# EAGLE board SE423_F28379D (EAGLE 7.7.0), part 1 of 3
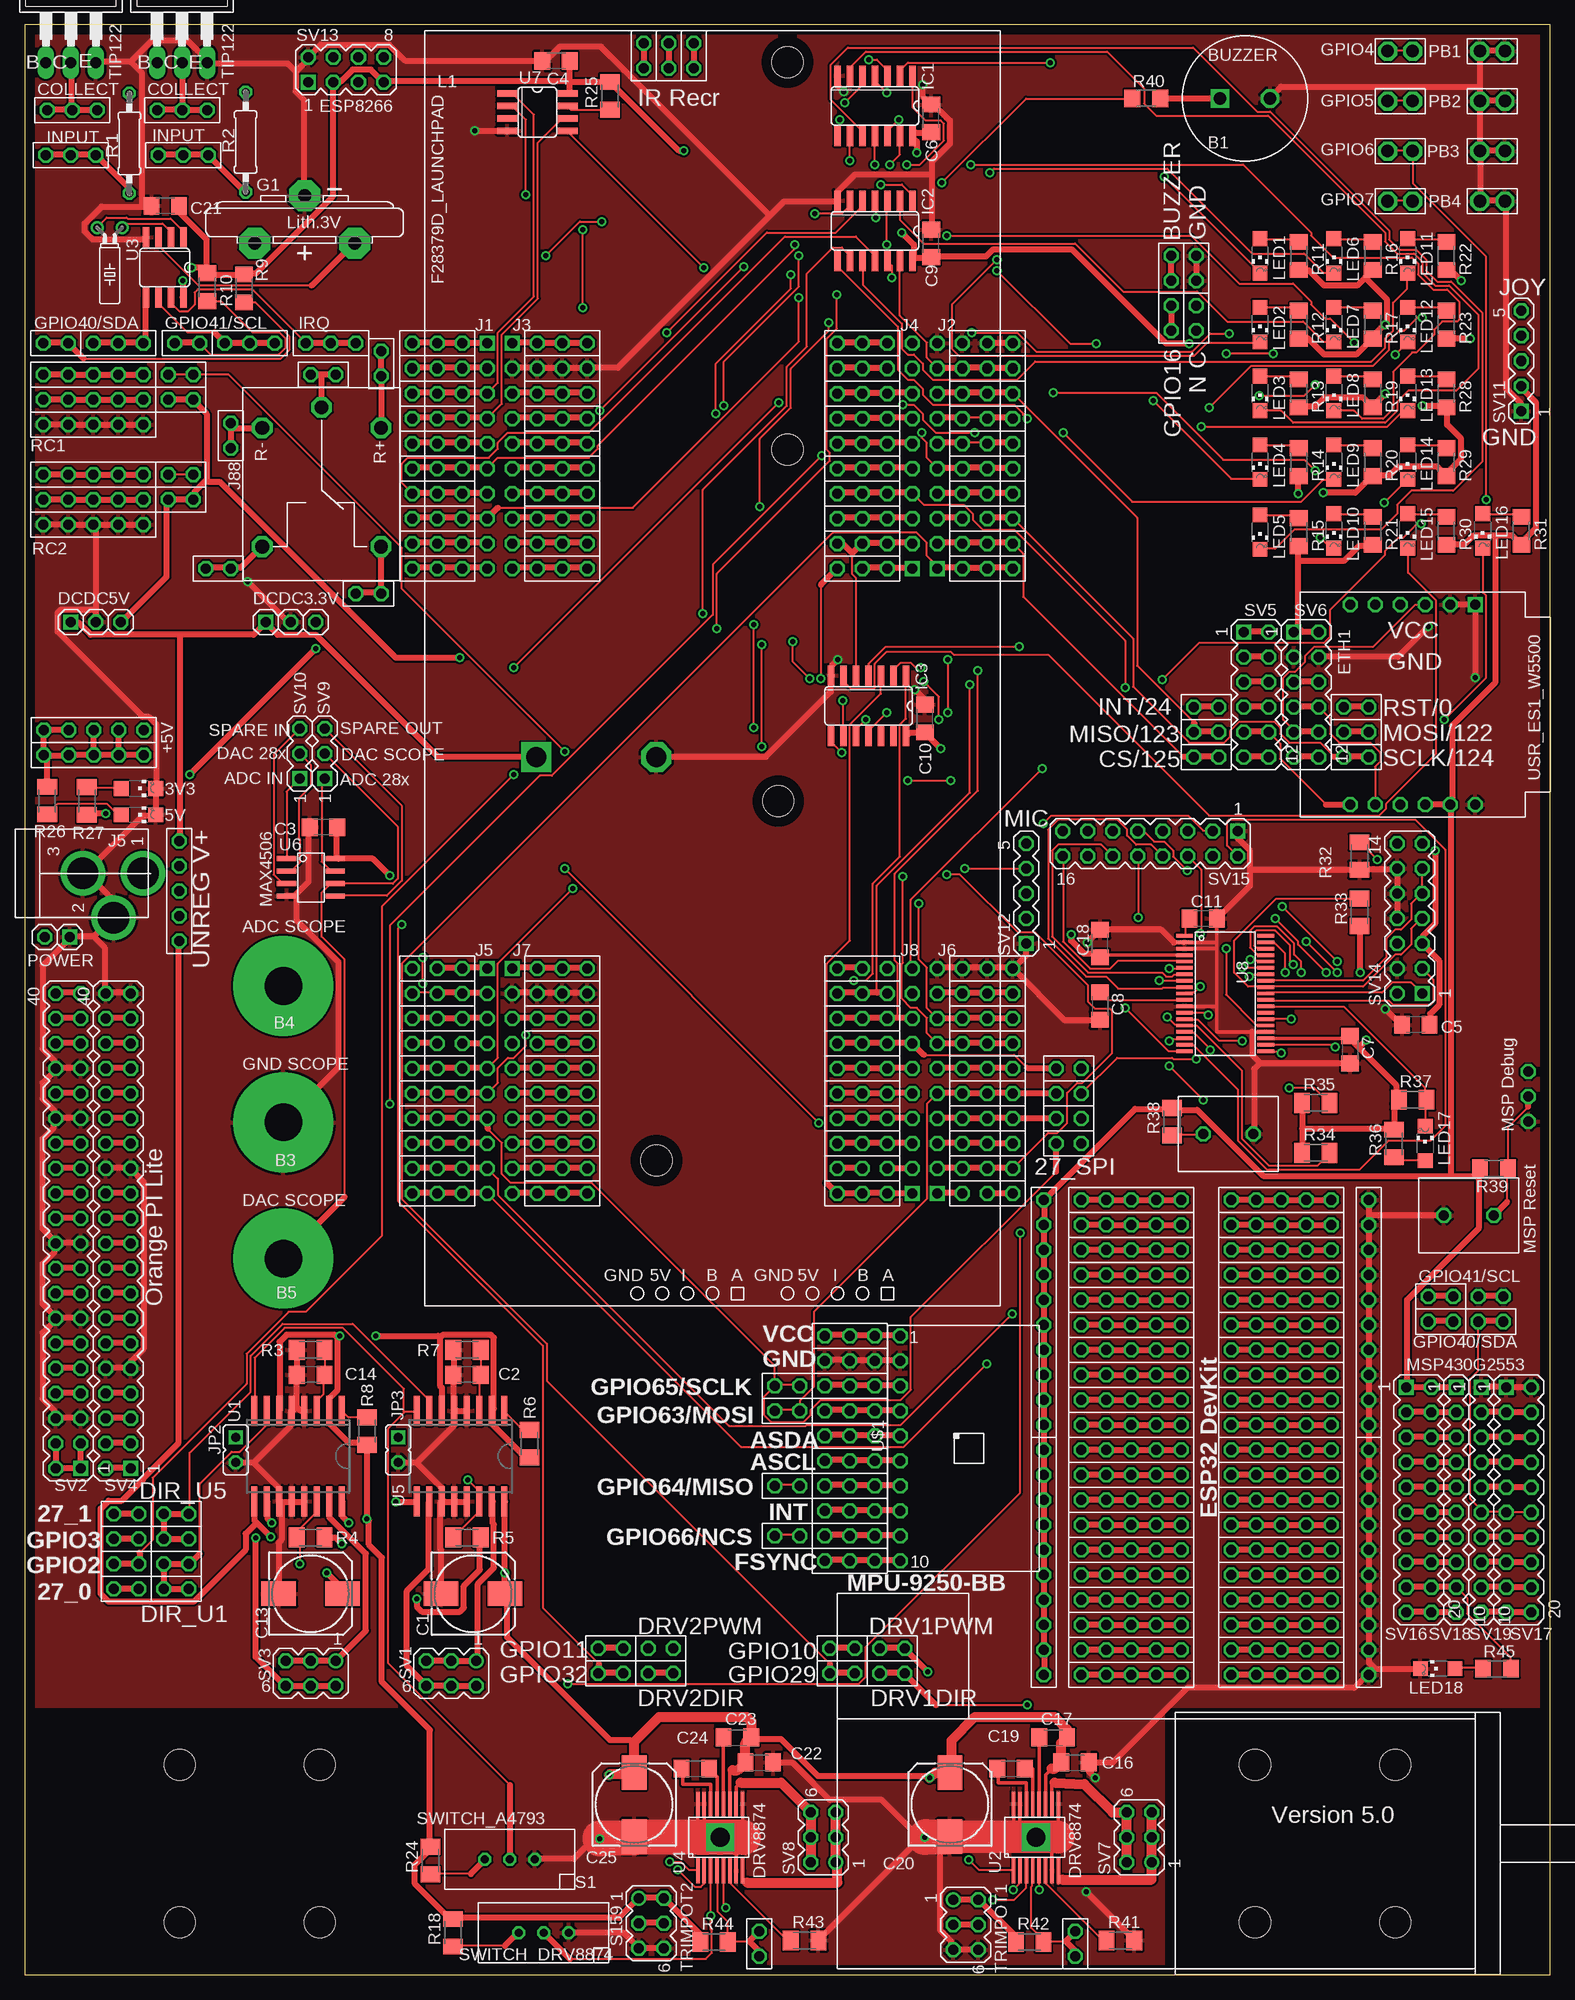
[diagram p0: board, top side]
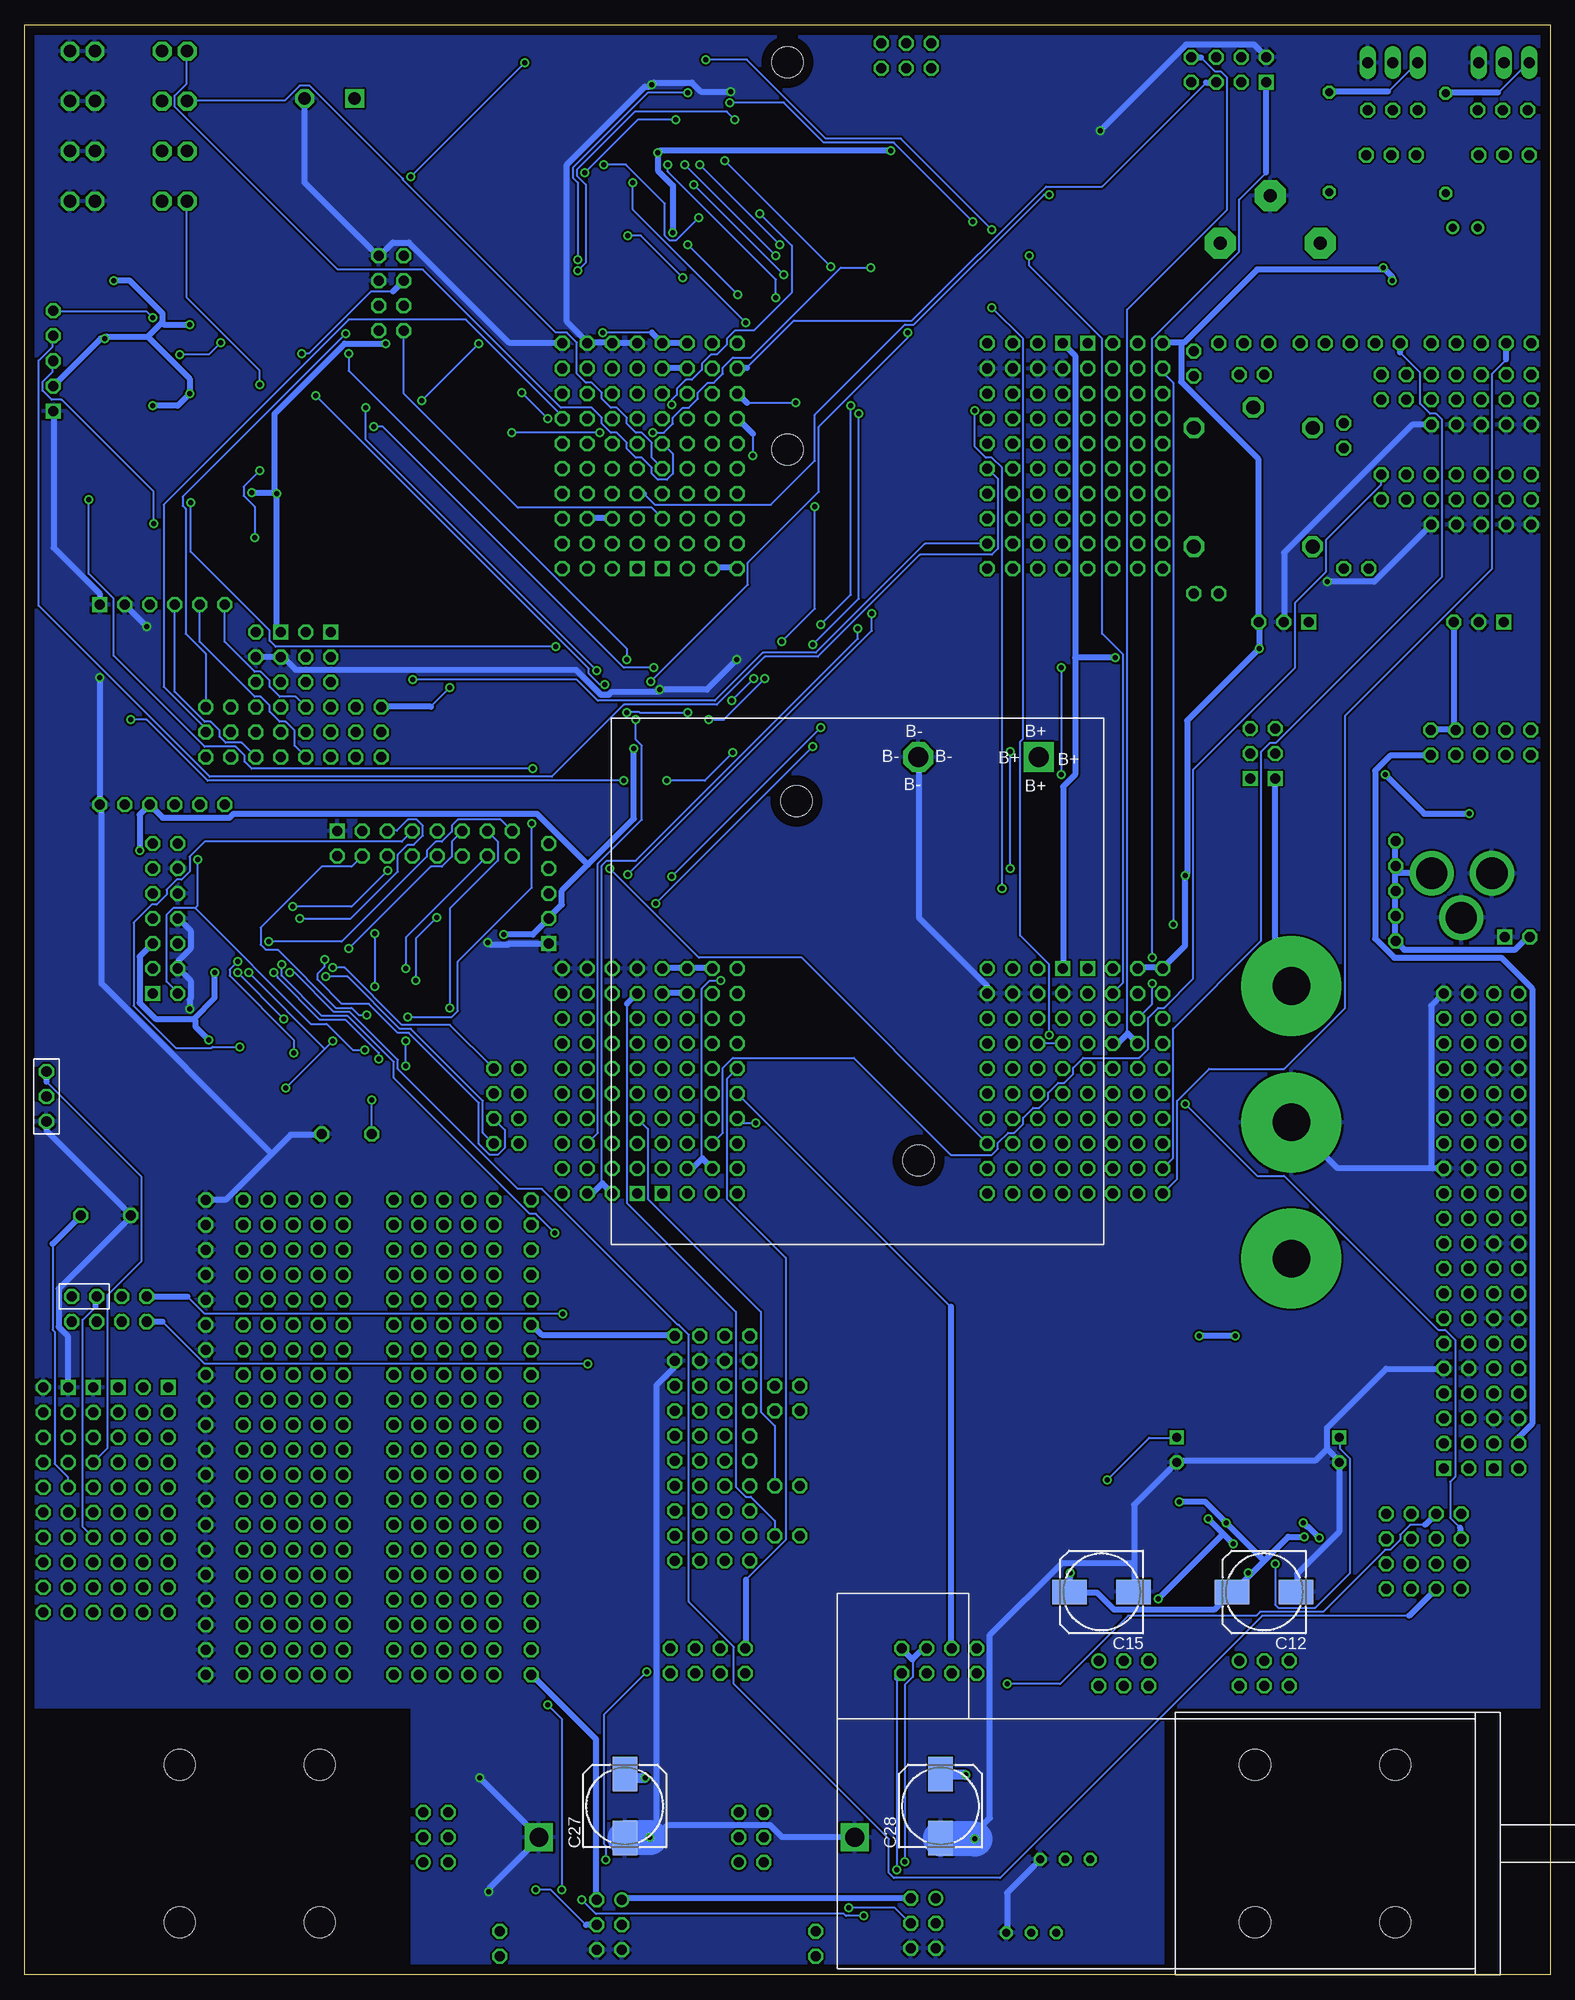
[diagram p1: board, bottom side, seen from below]

Size 154.94 x 198.12 mm. Coordinates in mm from the lower left corner, seen from the top.
Outline: 0,0 154.94,0 154.94,198.12 0,198.12 0,0
Copper layers (1*16): Top 0.035mm / dielectric 1.5mm / Bottom 0.035mm
Design rules "default *": minimum track width 7mil, minimum drill 20mil, track to track 8mil, track to pad 8mil, pad to pad 8mil, via to via 8mil, smd to smd 8mil, copper to edge 40mil, drill to drill 8mil, minimum pad ring 10mil, minimum via ring 8mil, stop-mask expansion 4mil, vias tented up to drill 20mil, thermal gap 10mil
Net classes: 0 default: width 0.203 mm, drill 0.508 mm, clearance 0.203 mm; 1 supply: width 0.61 mm, drill 0.508 mm, clearance 0.203 mm
tRestrict: area 0,0 to 38.7,26.7; area 116.2,0 to 154.9,26.7
bRestrict: area 116.2,0 to 154.9,26.7; area 0,0 to 38.7,26.7

## Footprints (pad centres in the part's own frame; a part is rotated, then mirrored left to right if it is on the bottom)
CHIPLED_1206 = smd 1.5 x 1.5: A 0,-1.75; C 0,1.75
BUZZER = drill 1.27 square: P$1 -2.54,0 | drill 1.27 octagon: P$2 2.54,0
BATTERY_4AA_HOLDER = drill 2.032 square: P$1 0,0 | drill 2.032 octagon: P$2 12.224,0 | hole 3.175: 12.224,40.958; 24.606,4.445
BANANA_MALE = drill 3.81 pad 10.16: P$1 0,0
153CLV-0810 = smd 3.5 x 2.5: + 3.25,0; - -3.25,0
C1206 = smd 1.6 x 1.8: 1 -1.4,0; 2 1.4,0
1X03 = drill 1.016 square: 1 -2.54,0 | drill 1.016 octagon: 2 0,0; 3 2.54,0
USR_ES1_W5500 = drill 1.016 square: P$1 0,0 | drill 1.016 octagon: P$2 0,-2.54; P$3 0,-5.08; P$4 0,-7.62; P$5 0,-10.16; P$6 0,-12.7; P$7 20.32,-12.7; P$8 20.32,-10.16; P$9 20.32,-7.62; P$10 20.32,-5.08; P$11 20.32,-2.54; P$12 20.32,0
CR2032V = drill 1.321 pad 3.15 octagon: + -2.54,-5.08; +@1 -2.54,5.08; - 2.286,0
SO14 = smd 0.66 x 2.032: 1 -3.81,-3.073; 2 -2.54,-3.073; 3 -1.27,-3.073; 4 0,-3.073; 5 1.27,-3.073; 6 2.54,-3.073; 7 3.81,-3.073; 8 3.81,3.073; 9 2.54,3.073; 10 1.27,3.073; 11 0,3.073; 12 -1.27,3.073; 13 -2.54,3.073; 14 -3.81,3.073
STRIP3 = drill 1.016 octagon: P$1 0,0; P$2 2.54,0; P$3 5.08,0
JACK-PMS = drill 3.175 pad 4.5: 1 -0.5,-3.31; 2 -5,-0.31; 3 -0.5,2.809
STRIP2 = drill 1.016 octagon: P$1 0,0; P$2 2.54,0
RELAY_JQC-3F_5V = drill 1.397 octagon: P$1 0,0; P$2 2.064,6.032; P$3 14.129,6.032; P$4 14.129,-6.032; P$5 2.064,-6.032
JP1 = drill 0.914 square: 1 0,-1.27 | drill 0.914 octagon: 2 0,1.27
F28379D_LAUNCHPAD = drill 1.016 square: P$1 -24.13,33.02; P$11 21.59,10.16; P$21 -21.59,33.02; P$31 19.05,10.16; P$41 -24.13,-30.48; P$51 21.59,-53.34; P$61 -21.59,-30.48; P$71 19.05,-53.34 | drill 1.016 octagon: P$2 -24.13,30.48; P$3 -24.13,27.94; P$4 -24.13,25.4; P$5 -24.13,22.86; P$6 -24.13,20.32; P$7 -24.13,17.78; P$8 -24.13,15.24; P$9 -24.13,12.7; P$10 -24.13,10.16; P$12 21.59,12.7; P$13 21.59,15.24; P$14 21.59,17.78; P$15 21.59,20.32; P$16 21.59,22.86; P$17 21.59,25.4; P$18 21.59,27.94; P$19 21.59,30.48; P$20 21.59,33.02; P$22 -21.59,30.48; P$23 -21.59,27.94; P$24 -21.59,25.4; P$25 -21.59,22.86; P$26 -21.59,20.32; P$27 -21.59,17.78; P$28 -21.59,15.24; P$29 -21.59,12.7; P$30 -21.59,10.16; P$32 19.05,12.7; P$33 19.05,15.24; P$34 19.05,17.78; P$35 19.05,20.32; P$36 19.05,22.86; P$37 19.05,25.4; P$38 19.05,27.94; P$39 19.05,30.48; P$40 19.05,33.02; P$42 -24.13,-33.02; P$43 -24.13,-35.56; P$44 -24.13,-38.1; P$45 -24.13,-40.64; P$46 -24.13,-43.18; P$47 -24.13,-45.72; P$48 -24.13,-48.26; P$49 -24.13,-50.8; P$50 -24.13,-53.34; P$52 21.59,-50.8; P$53 21.59,-48.26; P$54 21.59,-45.72; P$55 21.59,-43.18; P$56 21.59,-40.64; P$57 21.59,-38.1; P$58 21.59,-35.56; P$59 21.59,-33.02; P$60 21.59,-30.48; P$62 -21.59,-33.02; P$63 -21.59,-35.56; P$64 -21.59,-38.1; P$65 -21.59,-40.64; P$66 -21.59,-43.18; P$67 -21.59,-45.72; P$68 -21.59,-48.26; P$69 -21.59,-50.8; P$70 -21.59,-53.34; P$72 19.05,-50.8; P$73 19.05,-48.26; P$74 19.05,-45.72; P$75 19.05,-43.18; P$76 19.05,-40.64; P$77 19.05,-38.1; P$78 19.05,-35.56; P$79 19.05,-33.02; P$80 19.05,-30.48
TH_PUSHBUTTON = drill 1.016 octagon: 1 0,2.54; 2 0,-2.54
1X02 = drill 1.016 square: 1 -1.27,0 | drill 1.016 octagon: 2 1.27,0
TC26H = drill 0.813: 1 -1.27,0; 2 1.27,0
0207/10 = drill 0.813 octagon: 1 -5.08,0; 2 5.08,0
M1206 = smd 1.6 x 2: 1 -1.4,0; 2 1.4,0
R1206 = smd 1.6 x 1.803: 1 -1.422,0; 2 1.422,0
SWITCH_SLIDE = drill 0.813 octagon: P$1 0,-5.08; P$2 0,-2.54; P$3 0,0
STRIP5 = drill 1.016 octagon: P$1 0,0; P$2 2.54,0; P$3 5.08,0; P$4 7.62,0; P$5 10.16,0
STRIP10 = drill 1.016 octagon: P$1 0,0; P$2 2.54,0; P$3 5.08,0; P$4 7.62,0; P$5 10.16,0; P$6 12.7,0; P$7 15.24,0; P$8 17.78,0; P$9 20.32,0; P$10 22.86,0
MA03-2 = drill 1.016: 1 -2.54,-1.27 | drill 1.016 octagon: 2 -2.54,1.27; 3 0,-1.27; 4 0,1.27; 5 2.54,-1.27; 6 2.54,1.27
MA20-2 = drill 1.016 square: 1 -24.13,-1.27 | drill 1.016 octagon: 2 -24.13,1.27; 3 -21.59,-1.27; 4 -21.59,1.27; 5 -19.05,-1.27; 6 -19.05,1.27; 7 -16.51,-1.27; 8 -16.51,1.27; 9 -13.97,-1.27; 10 -13.97,1.27; 11 -11.43,-1.27; 12 -11.43,1.27; 13 -8.89,-1.27; 14 -8.89,1.27; 15 -6.35,-1.27; 16 -6.35,1.27; 17 -3.81,-1.27; 18 -3.81,1.27; 19 -1.27,-1.27; 20 -1.27,1.27; 21 1.27,-1.27; 22 1.27,1.27; 23 3.81,-1.27; 24 3.81,1.27; 25 6.35,-1.27; 26 6.35,1.27; 27 8.89,-1.27; 28 8.89,1.27; 29 11.43,-1.27; 30 11.43,1.27; 31 13.97,-1.27; 32 13.97,1.27; 33 16.51,-1.27; 34 16.51,1.27; 35 19.05,-1.27; 36 19.05,1.27; 37 21.59,-1.27; 38 21.59,1.27; 39 24.13,-1.27; 40 24.13,1.27
MA06-2 = drill 1.016 square: 1 -6.35,-1.27 | drill 1.016 octagon: 2 -6.35,1.27; 3 -3.81,-1.27; 4 -3.81,1.27; 5 -1.27,-1.27; 6 -1.27,1.27; 7 1.27,-1.27; 8 1.27,1.27; 9 3.81,-1.27; 10 3.81,1.27; 11 6.35,-1.27; 12 6.35,1.27
MA03-1 = drill 1.016 square: 1 -2.54,0 | drill 1.016 octagon: 2 0,0; 3 2.54,0
MA05-1 = drill 1.016 square: 1 -5.08,0 | drill 1.016 octagon: 2 -2.54,0; 3 0,0; 4 2.54,0; 5 5.08,0
MA04-2 = drill 1.016 square: 1 -3.81,-1.27 | drill 1.016 octagon: 2 -3.81,1.27; 3 -1.27,-1.27; 4 -1.27,1.27; 5 1.27,-1.27; 6 1.27,1.27; 7 3.81,-1.27; 8 3.81,1.27
MA07-2 = drill 1.016 square: 1 -7.62,-1.27 | drill 1.016 octagon: 2 -7.62,1.27; 3 -5.08,-1.27; 4 -5.08,1.27; 5 -2.54,-1.27; 6 -2.54,1.27; 7 0,-1.27; 8 0,1.27; 9 2.54,-1.27; 10 2.54,1.27; 11 5.08,-1.27; 12 5.08,1.27; 13 7.62,-1.27; 14 7.62,1.27
MA08-2 = drill 1.016 square: 1 -8.89,-1.27 | drill 1.016 octagon: 2 -8.89,1.27; 3 -6.35,-1.27; 4 -6.35,1.27; 5 -3.81,-1.27; 6 -3.81,1.27; 7 -1.27,-1.27; 8 -1.27,1.27; 9 1.27,-1.27; 10 1.27,1.27; 11 3.81,-1.27; 12 3.81,1.27; 13 6.35,-1.27; 14 6.35,1.27; 15 8.89,-1.27; 16 8.89,1.27
MA10-2 = drill 1.016 square: 1 -11.43,-1.27 | drill 1.016 octagon: 2 -11.43,1.27; 3 -8.89,-1.27; 4 -8.89,1.27; 5 -6.35,-1.27; 6 -6.35,1.27; 7 -3.81,-1.27; 8 -3.81,1.27; 9 -1.27,-1.27; 10 -1.27,1.27; 11 1.27,-1.27; 12 1.27,1.27; 13 3.81,-1.27; 14 3.81,1.27; 15 6.35,-1.27; 16 6.35,1.27; 17 8.89,-1.27; 18 8.89,1.27; 19 11.43,-1.27; 20 11.43,1.27
MA10-1 = drill 1.016 square: 1 -11.43,0 | drill 1.016 octagon: 2 -8.89,0; 3 -6.35,0; 4 -3.81,0; 5 -1.27,0; 6 1.27,0; 7 3.81,0; 8 6.35,0; 9 8.89,0; 10 11.43,0
TO220 = drill 1.118 long: 1 -2.54,-6.35; 2 0,-6.35; 3 2.54,-6.35
SO16W_LONGERPINS = smd 0.6 x 3.048: 1 -4.445,-4.6; 2 -3.175,-4.6; 3 -1.905,-4.6; 4 -0.635,-4.6; 5 0.635,-4.6; 6 1.905,-4.6; 7 3.175,-4.6; 8 4.445,-4.6; 9 4.445,4.6; 10 3.175,4.6; 11 1.905,4.6; 12 0.635,4.6; 13 -0.635,4.6; 14 -1.905,4.6; 15 -3.175,4.6; 16 -4.445,4.6
HTSSOP16 = smd 2.5 x 0.35: P$1 -3.4,2.275; P$2 -3.4,1.625; P$3 -3.4,0.975; P$4 -3.4,0.325; P$5 -3.4,-0.325; P$6 -3.4,-0.975; P$7 -3.4,-1.625; P$8 -3.4,-2.275; P$9 3.4,-2.275; P$10 3.4,-1.625; P$11 3.4,-0.975; P$12 3.4,-0.325; P$13 3.4,0.325; P$14 3.4,0.975; P$15 3.4,1.625; P$16 3.4,2.275 | drill 1.905 pad 2.54 square: P$17 0,0
SO08 = smd 0.66 x 2.032: 1 -1.905,-3.073; 2 -0.635,-3.073; 3 0.635,-3.073; 4 1.905,-3.073; 5 1.905,3.073; 6 0.635,3.073; 7 -0.635,3.073; 8 -1.905,3.073
SOIC-8 = smd 1.98 x 0.53: P$1 -2.465,1.905; P$2 -2.465,0.635; P$3 -2.465,-0.635; P$4 -2.465,-1.905; P$5 2.465,-1.905; P$6 2.465,-0.635; P$7 2.465,0.635; P$8 2.465,1.905
DA38 = smd 0.35 x 1.705: 1 -5.85,-4.12; 2 -5.2,-4.12; 3 -4.55,-4.12; 4 -3.9,-4.12; 5 -3.25,-4.12; 6 -2.6,-4.12; 7 -1.95,-4.12; 8 -1.3,-4.12; 9 -0.65,-4.12; 10 0,-4.12; 11 0.65,-4.12; 12 1.3,-4.12; 13 1.95,-4.12; 14 2.6,-4.12; 15 3.25,-4.12; 16 3.9,-4.12; 17 4.55,-4.12; 18 5.2,-4.12; 19 5.85,-4.12; 20 5.85,4.12; 21 5.2,4.12; 22 4.55,4.12; 23 3.9,4.12; 24 3.25,4.12; 25 2.6,4.12; 26 1.95,4.12; 27 1.3,4.12; 28 0.65,4.12; 29 0,4.12; 30 -0.65,4.12; 31 -1.3,4.12; 32 -1.95,4.12; 33 -2.6,4.12; 34 -3.25,4.12; 35 -3.9,4.12; 36 -4.55,4.12; 37 -5.2,4.12; 38 -5.85,4.12
MPU-9250-BB = drill 1.016 octagon: 1 -11.434,-6.96; 2 -8.894,-6.96; 3 -6.354,-6.96; 4 -3.814,-6.96; 5 -1.274,-6.96; 6 1.266,-6.96; 7 3.806,-6.96; 8 6.346,-6.96; 9 8.886,-6.96; 10 11.426,-6.96
GEARMOTOR_MOUNT = hole 3.175: 7.112,8.001; -7.112,8.001; -7.112,-8.001; 7.112,-8.001
CASTERWHEEL = hole 3.175: 19.685,0; -19.685,0
2PIN50MIL = drill 1.27 octagon: P$1 0,0; P$2 2.54,0

## Placement (x,y rotation side)
3V3  [CHIPLED_1206]  11.56,120.52 270 top
5V  [CHIPLED_1206]  11.56,117.86 270 top
B1  BUZZER  [BUZZER]  123.95,190.63 0 top
B2  BATTERY_4AA_HOLDER  [BATTERY_4AA_HOLDER]  51.94,123.7 180 bottom
B3  GND SCOPE  [BANANA_MALE]  26.29,86.61 0 top
B4  ADC SCOPE  [BANANA_MALE]  26.29,100.46 0 top
B5  DAC SCOPE  [BANANA_MALE]  26.29,72.77 0 top
C1  47uF  [153CLV-0810]  45.56,38.73 0 top
C2  680pF  [C1206]  44.92,60.95 180 top
C3  0.1uf  [C1206]  30.35,116.59 180 top
C4  0.1uf  [C1206]  53.98,194.44 180 top
C5  0.1 uF  [C1206]  141.29,96.52 180 top
C6  0.1uf  [C1206]  92.08,188.59 90 top
C7  2.2 uF  [C1206]  134.62,93.98 270 top
C8  2.2 uF  [C1206]  109.22,98.42 270 top
C9  0.1uf  [C1206]  92.08,175.9 90 top
C10  0.1uf  [C1206]  91.44,127.64 90 top
C11  2.2 uF  [C1206]  119.7,107.31 0 top
C12  47uF  [153CLV-0810]  29.05,38.89 180 bottom
C13  47uF  [153CLV-0810]  29.05,38.73 0 top
C14  680pF  [C1206]  29.05,60.95 180 top
C15  47uF  [153CLV-0810]  45.56,38.89 180 bottom
C16  0.1uF  [C1206]  106.68,21.59 0 top
C17  0.1uF  [C1206]  104.46,24.13 0 top
C18  2.2 uF  [C1206]  109.22,104.78 90 top
C19  22nF  [C1206]  100.17,20.95 0 top
C20  47uF  [153CLV-0810]  93.98,17.3 90 top
C21  0.1uf  [C1206]  14.29,179.71 180 top
C22  0.1uF  [C1206]  74.61,21.59 0 top
C23  0.1uF  [C1206]  72.39,24.13 0 top
C24  22nF  [C1206]  68.1,20.95 0 top
C25  47uF  [153CLV-0810]  61.91,17.3 90 top
C27  47uF  [153CLV-0810]  93.98,17.14 90 bottom
C28  47uF  [153CLV-0810]  61.91,17.14 90 bottom
DCDC3.3V  [1X03]  27.05,137.41 0 top
DCDC5V  [1X03]  7.24,137.41 0 top
ETH1  USR_ES1_W5500  [USR_ES1_W5500]  147.32,139.19 270 top
G1  CR2032V  [CR2032V]  28.44,178.46 90 top
IC1  7404D  [SO14]  86.36,189.87 180 top
IC2  7404D  [SO14]  86.36,177.16 180 top
IC3  7404D  [SO14]  85.72,128.91 180 top
J1  STRIP3  [STRIP3]  28.57,165.74 0 top
J2  STRIP3  [STRIP3]  20.32,165.74 0 top
J3  STRIP3  [STRIP3]  6.99,165.74 0 top
J4  STRIP3  [STRIP3]  2.28,189.45 0 top
J5  [JACK-PMS]  8.72,112.4 90 top
J6  STRIP3  [STRIP3]  2.15,184.87 0 top
J7  STRIP2  [STRIP2]  119,172.09 90 top
J8  STRIP2  [STRIP2]  119,167 90 top
J9  STRIP2  [STRIP2]  118.75,128.78 0 top
J10  STRIP3  [STRIP3]  39.37,165.74 0 top
J11  STRIP2  [STRIP2]  133.99,128.78 0 top
J12  STRIP2  [STRIP2]  62.87,193.68 90 top
J13  STRIP2  [STRIP2]  65.41,193.68 90 top
J14  STRIP3  [STRIP3]  39.37,163.19 0 top
J15  STRIP3  [STRIP3]  39.37,160.66 0 top
J16  STRIP3  [STRIP3]  39.37,158.12 0 top
J17  STRIP3  [STRIP3]  39.37,155.57 0 top
J18  STRIP3  [STRIP3]  39.37,153.03 0 top
J19  STRIP3  [STRIP3]  39.37,150.5 0 top
J20  STRIP3  [STRIP3]  39.37,147.96 0 top
J21  STRIP3  [STRIP3]  39.37,145.41 0 top
J22  STRIP2  [STRIP2]  67.94,193.68 90 top
J23  STRIP3  [STRIP3]  13.46,189.45 0 top
J24  STRIP3  [STRIP3]  13.58,184.87 0 top
J25  STRIP2  [STRIP2]  14.13,39.21 0 top
J26  STRIP2  [STRIP2]  9.05,39.21 0 top
J27  STRIP2  [STRIP2]  9.05,46.83 0 top
J28  STRIP3  [STRIP3]  39.37,142.88 0 top
J29  STRIP3  [STRIP3]  95.25,142.88 0 top
J30  STRIP3  [STRIP3]  95.25,145.41 0 top
J31  STRIP3  [STRIP3]  95.25,147.96 0 top
J32  STRIP3  [STRIP3]  95.25,150.5 0 top
J33  STRIP3  [STRIP3]  95.25,153.03 0 top
J34  STRIP2  [STRIP2]  14.13,46.83 0 top
J35  STRIP2  [STRIP2]  107.31,87 180 top
J36  STRIP2  [STRIP2]  107.31,89.53 180 top
J37  STRIP2  [STRIP2]  107.31,92.08 180 top
J38  STRIP2  [STRIP2]  107.31,84.45 180 top
J39  STRIP2  [STRIP2]  150.18,68.9 0 bottom
J40  STRIP2  [STRIP2]  142.56,68.9 0 top
J41  STRIP2  [STRIP2]  147.64,66.36 0 top
J42  STRIP2  [STRIP2]  142.56,66.36 0 top
J43  STRIP3  [STRIP3]  152.72,86.68 90 bottom
J66  STRIP2  [STRIP2]  133.99,126.24 0 top
J67  STRIP2  [STRIP2]  118.75,126.24 0 top
J68  STRIP2  [STRIP2]  133.99,123.7 0 top
J69  STRIP2  [STRIP2]  118.75,123.7 0 top
J78  STRIP2  [STRIP2]  106.68,4.45 270 top
J79  STRIP2  [STRIP2]  86.84,33.18 0 top
J80  STRIP2  [STRIP2]  86.84,30.64 0 top
J81  STRIP2  [STRIP2]  74.61,4.45 270 top
J82  STRIP2  [STRIP2]  63.34,33.18 0 top
J83  STRIP2  [STRIP2]  63.34,30.64 0 top
J84  STRIP2  [STRIP2]  81.76,33.18 0 top
J85  STRIP2  [STRIP2]  81.76,30.64 0 top
J86  STRIP2  [STRIP2]  58.26,33.18 0 top
J87  STRIP2  [STRIP2]  58.26,30.64 0 top
J88  RELAY_JQC-3F_5V  [RELAY_JQC-3F_5V]  30.16,159.23 270 top
J89  STRIP2  [STRIP2]  36.2,164.94 270 top
J90  STRIP2  [STRIP2]  20.95,157.64 270 top
J91  STRIP2  [STRIP2]  29.05,162.56 0 top
J92  STRIP2  [STRIP2]  33.66,140.34 0 top
J93  STRIP2  [STRIP2]  18.41,142.88 0 top
J98  STRIP3  [STRIP3]  95.25,155.57 0 top
J99  STRIP3  [STRIP3]  95.25,158.12 0 top
J100  STRIP3  [STRIP3]  95.25,160.66 0 top
J101  STRIP3  [STRIP3]  95.25,163.19 0 top
J102  STRIP3  [STRIP3]  95.25,165.74 0 top
J103  STRIP3  [STRIP3]  52.07,165.74 0 top
J104  STRIP3  [STRIP3]  52.07,163.19 0 top
J105  STRIP3  [STRIP3]  52.07,160.66 0 top
J106  STRIP3  [STRIP3]  52.07,158.12 0 top
J107  STRIP3  [STRIP3]  52.07,155.57 0 top
J108  STRIP3  [STRIP3]  52.07,153.03 0 top
J109  STRIP3  [STRIP3]  52.07,150.5 0 top
J110  STRIP3  [STRIP3]  52.07,147.96 0 top
J111  STRIP3  [STRIP3]  52.07,145.41 0 top
J112  STRIP3  [STRIP3]  52.07,142.88 0 top
J113  STRIP3  [STRIP3]  82.55,142.88 0 top
J114  STRIP3  [STRIP3]  82.55,145.41 0 top
J115  STRIP3  [STRIP3]  82.55,147.96 0 top
J116  STRIP3  [STRIP3]  82.55,150.5 0 top
J117  STRIP3  [STRIP3]  82.55,153.03 0 top
J118  STRIP3  [STRIP3]  82.55,155.57 0 top
J119  STRIP3  [STRIP3]  82.55,158.12 0 top
J120  STRIP3  [STRIP3]  82.55,160.66 0 top
J121  STRIP3  [STRIP3]  82.55,163.19 0 top
J122  STRIP3  [STRIP3]  82.55,165.74 0 top
J123  STRIP3  [STRIP3]  81.28,64.93 0 top
J124  STRIP3  [STRIP3]  81.28,62.39 0 top
J125  STRIP3  [STRIP3]  81.28,59.85 0 top
J126  STRIP3  [STRIP3]  81.28,57.31 0 top
J127  STRIP3  [STRIP3]  81.28,54.77 0 top
J128  STRIP3  [STRIP3]  81.28,52.23 0 top
J129  STRIP3  [STRIP3]  81.28,49.69 0 top
J130  STRIP3  [STRIP3]  81.28,47.15 0 top
J131  STRIP3  [STRIP3]  81.28,44.61 0 top
J132  STRIP3  [STRIP3]  81.28,42.07 0 top
J133  STRIP3  [STRIP3]  82.55,102.23 0 top
J134  STRIP3  [STRIP3]  82.55,99.69 0 top
J135  STRIP3  [STRIP3]  82.55,97.16 0 top
J136  STRIP3  [STRIP3]  82.55,94.61 0 top
J137  STRIP3  [STRIP3]  82.55,92.08 0 top
J138  STRIP3  [STRIP3]  82.55,89.53 0 top
J139  STRIP3  [STRIP3]  82.55,87 0 top
J140  STRIP3  [STRIP3]  82.55,84.45 0 top
J141  STRIP3  [STRIP3]  82.55,81.92 0 top
J142  STRIP3  [STRIP3]  82.55,79.38 0 top
J143  STRIP3  [STRIP3]  52.07,79.38 0 top
J144  STRIP3  [STRIP3]  52.07,81.92 0 top
J145  STRIP3  [STRIP3]  52.07,84.45 0 top
J146  STRIP3  [STRIP3]  52.07,87 0 top
J147  STRIP3  [STRIP3]  52.07,89.53 0 top
J148  STRIP3  [STRIP3]  52.07,92.08 0 top
J149  STRIP3  [STRIP3]  52.07,94.61 0 top
J150  STRIP3  [STRIP3]  52.07,97.16 0 top
J151  STRIP3  [STRIP3]  52.07,99.69 0 top
J152  STRIP3  [STRIP3]  52.07,102.23 0 top
J153  STRIP3  [STRIP3]  95.25,102.23 0 top
J154  STRIP3  [STRIP3]  95.25,99.69 0 top
J155  STRIP3  [STRIP3]  95.25,97.16 0 top
J156  STRIP3  [STRIP3]  95.25,94.61 0 top
J157  STRIP3  [STRIP3]  95.25,92.08 0 top
J158  STRIP3  [STRIP3]  95.25,89.53 0 top
J159  STRIP3  [STRIP3]  95.25,87 0 top
J160  STRIP3  [STRIP3]  95.25,84.45 0 top
J161  STRIP3  [STRIP3]  95.25,81.92 0 top
J162  STRIP3  [STRIP3]  95.25,79.38 0 top
J163  STRIP3  [STRIP3]  39.37,79.38 0 top
J164  STRIP3  [STRIP3]  39.37,81.92 0 top
J165  STRIP3  [STRIP3]  39.37,84.45 0 top
J166  STRIP3  [STRIP3]  39.37,87 0 top
J167  STRIP3  [STRIP3]  39.37,89.53 0 top
J168  STRIP3  [STRIP3]  39.37,92.08 0 top
J169  STRIP3  [STRIP3]  39.37,94.61 0 top
J170  STRIP3  [STRIP3]  39.37,97.16 0 top
J176  STRIP3  [STRIP3]  39.37,99.69 0 top
J177  STRIP3  [STRIP3]  39.37,102.23 0 top
J194  STRIP2  [STRIP2]  116.46,172.09 90 top
J196  STRIP2  [STRIP2]  14.13,41.75 0 top
J197  STRIP2  [STRIP2]  14.13,44.29 0 top
J198  STRIP2  [STRIP2]  9.05,41.75 0 top
J199  STRIP2  [STRIP2]  9.05,44.29 0 top
J200  STRIP2  [STRIP2]  14.61,160.02 0 top
J201  STRIP2  [STRIP2]  14.61,162.56 0 top
J202  STRIP2  [STRIP2]  14.61,152.4 0 top
J203  STRIP2  [STRIP2]  14.61,149.86 0 top
J204  STRIP2  [STRIP2]  76.2,57.31 0 top
J205  STRIP2  [STRIP2]  76.2,49.69 0 top
J206  STRIP2  [STRIP2]  76.2,59.85 0 top
J207  STRIP2  [STRIP2]  76.2,44.61 0 top
J208  STRIP2  [STRIP2]  1.91,165.74 0 top
J209  STRIP2  [STRIP2]  15.24,165.74 0 top
J251  STRIP2  [STRIP2]  116.46,167 90 top
JP2  [JP1]  21.43,53.33 180 top
JP3  [JP1]  37.94,53.33 180 top
L1  F28379D_LAUNCHPAD  [F28379D_LAUNCHPAD]  71.12,132.72 0 top
LED1  [CHIPLED_1206]  125.48,174.62 180 top
LED2  [CHIPLED_1206]  125.48,167.64 180 top
LED3  [CHIPLED_1206]  125.48,160.66 180 top
LED4  [CHIPLED_1206]  125.48,153.67 180 top
LED5  [CHIPLED_1206]  125.48,146.56 180 top
LED6  [CHIPLED_1206]  132.97,174.62 180 top
LED7  [CHIPLED_1206]  132.97,167.64 180 top
LED8  [CHIPLED_1206]  132.97,160.66 180 top
LED9  [CHIPLED_1206]  132.97,153.67 180 top
LED10  [CHIPLED_1206]  132.97,146.69 180 top
LED11  [CHIPLED_1206]  140.46,174.62 180 top
LED12  [CHIPLED_1206]  140.46,167.64 180 top
LED13  [CHIPLED_1206]  140.46,160.66 180 top
LED14  [CHIPLED_1206]  140.46,153.67 180 top
LED15  [CHIPLED_1206]  140.46,146.69 180 top
LED16  [CHIPLED_1206]  148.08,146.69 180 top
LED17  [CHIPLED_1206]  142.24,84.45 0 top
LED18  [CHIPLED_1206]  143.51,31.11 90 top
P1  [TH_PUSHBUTTON]  122.24,85.41 90 top
P2  [TH_PUSHBUTTON]  146.69,77.15 270 top
POWER  [1X02]  3.33,105.42 180 top
Q1  32.768KHz  [TC26H]  8.63,177.51 180 top
R1  R_B  [0207/10]  10.63,186.06 90 top
R2  R_B  [0207/10]  22.44,186.19 90 top
R3  24.9K  [M1206]  29.05,63.49 0 top
R4  2.2K  [M1206]  29.05,44.44 0 top
R5  2.2K  [M1206]  44.92,44.44 0 top
R6  2.2K  [M1206]  51.27,53.97 270 top
R7  24.9K  [M1206]  44.92,63.49 0 top
R8  2.2K  [M1206]  34.76,55.24 270 top
R9  4.7K  [R1206]  22.29,171.32 270 top
R10  4.7K  [R1206]  18.54,171.45 270 top
R11  [R1206]  129.41,174.62 270 top
R12  [R1206]  129.41,167.64 270 top
R13  [R1206]  129.41,160.66 270 top
R14  [R1206]  129.41,153.67 270 top
R15  [R1206]  129.41,146.56 270 top
R16  [R1206]  136.91,174.62 270 top
R17  [R1206]  136.91,167.64 270 top
R18  2.2K  [M1206]  43.49,4.28 90 top
R19  [R1206]  136.91,160.66 270 top
R20  [R1206]  136.91,153.67 270 top
R21  [R1206]  136.91,146.69 270 top
R22  [R1206]  144.4,174.62 270 top
R23  [R1206]  144.4,167.64 270 top
R24  2.2K  [M1206]  41.21,11.62 90 top
R25  10K  [M1206]  59.44,190.88 90 top
R26  1K  [M1206]  2.29,119.29 90 top
R27  1K  [M1206]  6.31,119.26 270 top
R28  [R1206]  144.4,160.66 270 top
R29  [R1206]  144.4,153.67 270 top
R30  [R1206]  144.4,146.69 270 top
R31  [R1206]  152.02,146.69 270 top
R32  4.7K  [M1206]  135.57,113.67 270 top
R33  4.7K  [M1206]  135.57,107.95 90 top
R34  4.7k  [M1206]  131.13,83.5 0 top
R35  4.7k  [M1206]  131.13,88.58 0 top
R36  1K  [M1206]  139.06,84.45 90 top
R37  4.7k  [M1206]  140.97,88.9 180 top
R38  4.7k  [M1206]  116.52,86.68 90 top
R39  10K  [R1206]  149.22,81.92 180 top
R40  100  [R1206]  113.92,190.63 0 top
R41  1.8K  [M1206]  111.28,3.49 0 top
R42  10K  [M1206]  102.08,3.33 0 top
R43  1.8K  [M1206]  79.22,3.49 0 top
R44  10K  [M1206]  70.01,3.33 0 top
R45  1K  [R1206]  149.54,31.11 0 top
S1  SWITCH_A4793  [SWITCH_SLIDE]  46.74,11.75 90 top
S17  STRIP5  [STRIP5]  12.12,123.91 180 top
S18  STRIP5  [STRIP5]  12.12,126.45 180 top
S20  STRIP10  [STRIP10]  136.53,30.48 90 top
S24  STRIP10  [STRIP10]  136.53,55.88 90 top
S53  STRIP10  [STRIP10]  103.5,30.48 90 top
S58  STRIP10  [STRIP10]  103.5,55.88 90 top
S129  STRIP5  [STRIP5]  12.06,157.48 180 top
S130  STRIP5  [STRIP5]  12.06,162.56 180 top
S137  STRIP5  [STRIP5]  12.06,147.32 180 top
S138  STRIP5  [STRIP5]  12.06,152.4 180 top
S139  STRIP5  [STRIP5]  12.06,149.86 180 top
S141  STRIP5  [STRIP5]  15.71,105.03 90 top
S147  STRIP5  [STRIP5]  12.06,160.02 180 top
S159  SWITCH_DRV8874  [SWITCH_SLIDE]  50.16,4.28 90 top
S167  STRIP5  [STRIP5]  107.31,78.74 0 top
S168  STRIP5  [STRIP5]  107.31,76.2 0 top
S169  STRIP5  [STRIP5]  107.31,73.66 0 top
S170  STRIP5  [STRIP5]  107.31,71.12 0 top
S171  STRIP5  [STRIP5]  107.31,68.58 0 top
S172  STRIP5  [STRIP5]  107.31,66.04 0 top
S173  STRIP5  [STRIP5]  107.31,63.5 0 top
S174  STRIP5  [STRIP5]  107.31,60.96 0 top
S175  STRIP5  [STRIP5]  107.31,58.42 0 top
S176  STRIP5  [STRIP5]  107.31,55.88 0 top
S177  STRIP5  [STRIP5]  107.31,53.34 0 top
S178  STRIP5  [STRIP5]  107.31,50.8 0 top
S179  STRIP5  [STRIP5]  107.31,48.26 0 top
S180  STRIP5  [STRIP5]  107.31,45.72 0 top
S181  STRIP5  [STRIP5]  107.31,43.18 0 top
S182  STRIP5  [STRIP5]  107.31,40.64 0 top
S183  STRIP5  [STRIP5]  107.31,38.1 0 top
S184  STRIP5  [STRIP5]  107.31,35.56 0 top
S185  STRIP5  [STRIP5]  107.31,33.02 0 top
S186  STRIP5  [STRIP5]  107.31,30.48 0 top
S187  STRIP5  [STRIP5]  122.56,30.48 0 top
S188  STRIP5  [STRIP5]  122.56,35.56 0 top
S189  STRIP5  [STRIP5]  122.56,33.02 0 top
S210  STRIP5  [STRIP5]  122.56,78.74 0 top
S211  STRIP5  [STRIP5]  122.56,76.2 0 top
S212  STRIP5  [STRIP5]  122.56,73.66 0 top
S213  STRIP5  [STRIP5]  122.56,71.12 0 top
S214  STRIP5  [STRIP5]  122.56,68.58 0 top
S215  STRIP5  [STRIP5]  122.56,66.04 0 top
S216  STRIP5  [STRIP5]  122.56,63.5 0 top
S217  STRIP5  [STRIP5]  122.56,60.96 0 top
S218  STRIP5  [STRIP5]  122.56,58.42 0 top
S219  STRIP5  [STRIP5]  122.56,55.88 0 top
S220  STRIP5  [STRIP5]  122.56,53.34 0 top
S221  STRIP5  [STRIP5]  122.56,50.8 0 top
S222  STRIP5  [STRIP5]  122.56,48.26 0 top
S223  STRIP5  [STRIP5]  122.56,45.72 0 top
S224  STRIP5  [STRIP5]  122.56,43.18 0 top
S225  STRIP5  [STRIP5]  122.56,40.64 0 top
S226  STRIP5  [STRIP5]  122.56,38.1 0 top
SV1  [MA03-2]  43.33,30.63 180 top
SV2  [MA20-2]  4.45,75.56 90 top
SV3  [MA03-2]  29.05,30.63 180 top
SV4  [MA20-2]  9.53,75.56 90 top
SV5  [MA06-2]  125.09,130.05 270 top
SV6  [MA06-2]  130.18,130.05 270 top
SV7  [MA03-2]  113.19,13.97 90 top
SV8  [MA03-2]  81.12,13.97 90 top
SV9  [MA03-1]  30.48,124.08 90 top
SV10  [MA03-1]  27.94,124.08 90 top
SV11  [MA05-1]  152.02,163.96 90 top
SV12  [MA05-1]  101.73,109.86 90 top
SV13  [MA04-2]  32.64,193.55 0 top
SV14  [MA07-2]  140.65,107.31 90 top
SV15  [MA08-2]  114.3,114.94 180 top
SV16  [MA10-2]  141.6,48.26 270 top
SV17  [MA10-2]  151.76,48.26 270 top
SV18  [MA10-1]  145.41,48.26 270 top
SV19  [MA10-1]  147.96,48.26 270 top
T1  TIP125  [TO220]  4.69,200.62 0 top
T2  TIP125  [TO220]  16,200.62 0 top
TRIMPOT1  [MA03-2]  95.57,5.08 270 top
TRIMPOT2  [MA03-2]  63.66,5.24 270 top
U1  A4973  [SO16W_LONGERPINS]  27.78,52.7 180 top
U2  DRV8874  [HTSSOP16]  102.71,13.97 90 top
U3  BQ32000  [SO08]  14.22,173.44 180 top
U4  DRV8874  [HTSSOP16]  70.64,13.97 90 top
U5  A4973  [SO16W_LONGERPINS]  44.29,52.7 180 top
U6  MAX4506  [SOIC-8]  29.08,111.51 0 top
U7  IS62WVS512  [SO08]  52.07,189.23 270 top
U8  F28027  [DA38]  121.92,99.69 270 top
U$1  MPU-9250-BB  [MPU-9250-BB]  95.89,53.5 270 top
U$2  GEARMOTOR_MOUNT  [GEARMOTOR_MOUNT]  132.08,13.34 0 top
U$3  GEARMOTOR_MOUNT  [GEARMOTOR_MOUNT]  22.86,13.34 0 bottom
U$4  CASTERWHEEL  [CASTERWHEEL]  77.47,174.62 90 top
U$5  [2PIN50MIL]  138.43,195.42 0 top
U$6  [2PIN50MIL]  147.8,195.42 0 top
U$7  [2PIN50MIL]  147.8,190.34 0 top
U$8  [2PIN50MIL]  147.8,185.26 0 top
U$9  [2PIN50MIL]  147.8,180.18 0 top
U$10  [2PIN50MIL]  138.43,190.34 0 top
U$11  [2PIN50MIL]  138.43,185.26 0 top
U$12  [2PIN50MIL]  138.43,180.18 0 top

## Library data of the parts
3V3 5V LED1-LED18 = led
B1 B2 J88 L1 U2 U4 U$2-U$4 = SE423EagleLibrary
B3-B5 P1 P2 S17 S18 S20 S24 S53 S58 S129 S130 S137-S139 S141 S147 S167-S189 S210-S226 U1 U5 = custom
C1-C25 C27 C28 R1-R45 = rcl
DCDC3.3V DCDC5V POWER = pinhead
ETH1 = wiznet
G1 = battery
IC1-IC3 = 74xx-us
J1-J4 J6-J43 J66-J69 J78-J87 J89-J93 J98-J170 J176 J177 J194 J196-J209 J251 = strip
J5 = POWER-IN
JP2 JP3 = jumper
Q1 = crystal
S1 S159 = switch_slide
SV1-SV13 SV15-SV19 TRIMPOT1 TRIMPOT2 = con-lstb; OC_FARNELL: unknown; OC_NEWARK: unknown
SV14 = con-lstb
T1 T2 = keres
U3 U7 U8 = custom6
U6 = custom5
U$1 = MPU-9250_Breakoutboard
U$5-U$12 = custom7

## Nets
28027_GPIO0: J26.P$1 J26.P$2 U8.37
28027_GPIO1: J27.P$1 J27.P$2 U8.36
28027_GPIO2: SV15.16 U8.5
28027_GPIO3: SV15.14 U8.6
28027_GPIO4: SV15.12 U8.7
28027_GPIO5: SV15.10 U8.8
28027_GPIO6: SV15.8 U8.9
28027_GPIO7: SV15.6 U8.10
28027_GPIO12: SV15.4 U8.13
28027_GPIO34: LED17.C R37.1 U8.27
28027_SCL: R34.2 SV15.3 U8.15
28027_SDA: R35.2 SV15.5 U8.14
28027_SPICLKA: J38.P$1 U8.32
28027_SPISIMOA: J36.P$1 U8.35
28027_SPISOMIA: J35.P$1 U8.34
28027_SPISTEA: J37.P$1 U8.33
+5V [supply]: DCDC5V.3 J103.P$1 J103.P$2 J103.P$3 J152.P$1 J152.P$2 J152.P$3 J200.P$1 J200.P$2 J203.P$1 J203.P$2 L1.P$21 L1.P$61 R26.2 S17.P$1 S17.P$2 S17.P$3 S17.P$4 S17.P$5 S18.P$1 S18.P$2 S18.P$3 S18.P$4 S18.P$5 SV2.1 SV2.2 SV2.3 SV2.4
A4973EN: S1.P$2 U1.8 U5.8
ADCA0: SV15.7 U8.21
ADCA2: SV15.9 U8.20
ADCA4: SV15.13 U8.19
ADCA6: SV15.2 U8.18
ADCB2: SV15.11 U8.24
ADCB4: SV15.15 U8.25
ADCB6: U8.26
ADCIN14: J105.P$1 J105.P$2 J105.P$3 L1.P$23
ADCIN15: J150.P$1 J150.P$2 J150.P$3 L1.P$63
ADCINA2: J111.P$1 J111.P$2 J111.P$3 L1.P$29 SV11.3
ADCINA3: J108.P$1 J108.P$2 J108.P$3 L1.P$26 SV11.4
ADCINA4: J144.P$1 J144.P$2 J144.P$3 L1.P$69
ADCINA5: J147.P$1 J147.P$2 J147.P$3 L1.P$66
ADCINB2: J110.P$1 J110.P$2 J110.P$3 L1.P$28
ADCINB3: J107.P$1 J107.P$2 J107.P$3 L1.P$25
ADCINB4: J145.P$1 J145.P$2 J145.P$3 L1.P$68 SV12.4
ADCINB5: J148.P$1 J148.P$2 J148.P$3 L1.P$65
ADCINC2: J109.P$1 J109.P$2 J109.P$3 L1.P$27
ADCINC3: J106.P$1 J106.P$2 J106.P$3 L1.P$24
ADCINC4: J146.P$1 J146.P$2 J146.P$3 L1.P$67
ADCINC5: J149.P$1 J149.P$2 J149.P$3 L1.P$64
DACOUTA: J112.P$1 J112.P$2 J112.P$3 L1.P$30
DACOUTB: J143.P$1 J143.P$2 J143.P$3 L1.P$70
DRV1_DIR: J80.P$1 J80.P$2 U2.P$2
DRV1_M+: SV7.1 SV7.3 SV7.5 U2.P$8
DRV1_M-: SV7.2 SV7.4 SV7.6 U2.P$10
DRV1_PWM: J79.P$1 J79.P$2 U2.P$1
DRV2_DIR: J83.P$1 J83.P$2 U4.P$2
DRV2_M+: SV8.1 SV8.3 SV8.5 U4.P$8
DRV2_M-: SV8.2 SV8.4 SV8.6 U4.P$10
DRV2_PWM: J82.P$1 J82.P$2 U4.P$1
GND [supply]: 3V3.C 5V.C B1.P$2 B2.P$2 B3.P$1 C1.- C2.2 C3.2 C4.2 C5.2 C6.2 C7.2 C8.2 C9.2 C10.2 C11.2 C12.- C13.- C14.2 C15.- C16.2 C18.2 C20.- C21.2 C22.2 C25.- C27.- C28.- DCDC3.3V.2 DCDC5V.2 ETH1.P$1 ETH1.P$2 ETH1.P$12 G1.- IC1.7 IC2.7 IC3.7 J5.2 J5.3 J7.P$1 J7.P$2 J43.P$1 J102.P$1 J102.P$2 J102.P$3 J104.P$1 J104.P$2 J104.P$3 J124.P$1 J124.P$2 J124.P$3 J151.P$1 J151.P$2 J151.P$3 J153.P$1 J153.P$2 J153.P$3 JP2.2 JP3.2 L1.P$20 L1.P$22 L1.P$60 L1.P$62 LED18.C P1.2 P2.2 POWER.1 R3.1 R7.1 R32.2 R41.2 R43.2 S1.P$1 S20.P$1 S20.P$2 S20.P$3 S20.P$4 S20.P$5 S20.P$6 S20.P$7 S20.P$8 S20.P$9 S20.P$10 S24.P$1 S24.P$2 S24.P$3 S24.P$4 S24.P$5 S24.P$6 S24.P$7 S24.P$8 S24.P$9 S24.P$10 S129.P$1 S129.P$2 S129.P$3 S129.P$4 S129.P$5 S137.P$1 S137.P$2 S137.P$3 S137.P$4 S137.P$5 S159.P$1 SV2.5 SV2.6 SV2.13 SV2.14 SV2.19 SV2.20 SV2.29 SV2.30 SV2.33 SV2.34 SV4.9 SV4.10 SV4.25 SV4.26 SV4.39 SV4.40 SV6.3 SV6.4 SV11.1 SV12.1 SV13.2 SV14.4 SV14.8 SV14.10 SV14.12 SV15.1 SV17.1 SV17.2 SV19.1 T1.3 T2.3 TRIMPOT1.5 TRIMPOT1.6 TRIMPOT2.5 TRIMPOT2.6 U1.4 U1.5 U1.11 U1.12 U1.13 U2.P$7 U2.P$9 U2.P$15 U2.P$16 U2.P$17 U3.4 U4.P$7 U4.P$9 U4.P$15 U4.P$16 U4.P$17 U5.4 U5.5 U5.11 U5.12 U5.13 U6.P$4 U7.4 U8.2 U8.3 U8.12 U8.23 U$1.2 U$6.P$1 U$6.P$2 U$7.P$1 U$7.P$2 U$8.P$1 U$8.P$2 U$9.P$1 U$9.P$2
GPIO0: J11.P$1 J11.P$2 J122.P$1 J122.P$2 J122.P$3 L1.P$40
GPIO1: J121.P$1 J121.P$2 J121.P$3 L1.P$39 SV13.5
GPIO2: J120.P$1 J120.P$2 J120.P$3 J198.P$1 J198.P$2 L1.P$38
GPIO3: J119.P$1 J119.P$2 J119.P$3 J199.P$1 J199.P$2 L1.P$37
GPIO4: J118.P$1 J118.P$2 J118.P$3 L1.P$36 U$5.P$1 U$5.P$2
GPIO5: J117.P$1 J117.P$2 J117.P$3 L1.P$35 U$10.P$1 U$10.P$2
GPIO6: J133.P$1 J133.P$2 J133.P$3 L1.P$80 U$11.P$1 U$11.P$2
GPIO7: J134.P$1 J134.P$2 J134.P$3 L1.P$79 U$12.P$1 U$12.P$2
GPIO8: J135.P$1 J135.P$2 J135.P$3 L1.P$78 SV11.5
GPIO9: J37.P$2 J136.P$1 J136.P$2 J136.P$3 L1.P$77
GPIO10: J84.P$1 J84.P$2 J137.P$1 J137.P$2 J137.P$3 L1.P$76
GPIO11: J86.P$1 J86.P$2 J138.P$1 J138.P$2 J138.P$3 L1.P$75
GPIO14: J139.P$1 J139.P$2 J139.P$3 J201.P$1 J201.P$2 L1.P$74
GPIO15: J140.P$1 J140.P$2 J140.P$3 J202.P$1 J202.P$2 L1.P$73
GPIO16: J115.P$1 J115.P$2 J115.P$3 J251.P$1 J251.P$2 L1.P$33
GPIO18: J16.P$1 J16.P$2 J16.P$3 L1.P$4 U7.6
GPIO19: J15.P$1 J15.P$2 J15.P$3 L1.P$3 U7.1
GPIO22: IC1.1 J20.P$1 J20.P$2 J20.P$3 L1.P$8
GPIO24: J9.P$1 J9.P$2 J116.P$1 J116.P$2 J116.P$3 L1.P$34
GPIO25: IC2.3 J162.P$1 J162.P$2 J162.P$3 L1.P$51
GPIO26: IC2.5 J160.P$1 J160.P$2 J160.P$3 L1.P$53
GPIO27: IC2.9 J161.P$1 J161.P$2 J161.P$3 L1.P$52
GPIO29: J29.P$1 J29.P$2 J29.P$3 J85.P$1 J85.P$2 L1.P$11
GPIO32: J14.P$1 J14.P$2 J14.P$3 J87.P$1 J87.P$2 L1.P$2
GPIO40: J42.P$1 J42.P$2 J163.P$1 J163.P$2 J163.P$3 J208.P$1 J208.P$2 L1.P$50 R9.2
GPIO41: J40.P$1 J40.P$2 J164.P$1 J164.P$2 J164.P$3 J209.P$1 J209.P$2 L1.P$49 R10.2
GPIO52: J165.P$1 J165.P$2 J165.P$3 L1.P$48
GPIO56: J169.P$1 J169.P$2 J169.P$3 L1.P$44 SV13.8
GPIO58: J33.P$1 J33.P$2 J33.P$3 L1.P$15 U7.5
GPIO59: J32.P$1 J32.P$2 J32.P$3 L1.P$14 U7.2
GPIO60: IC2.11 J19.P$1 J19.P$2 J19.P$3 L1.P$7
GPIO61: IC2.13 J101.P$1 J101.P$2 J101.P$3 L1.P$19
GPIO63: J36.P$2 J158.P$1 J158.P$2 J158.P$3 J204.P$1 J204.P$2 L1.P$55
GPIO64: J35.P$2 J159.P$1 J159.P$2 J159.P$3 J205.P$1 J205.P$2 L1.P$54
GPIO65: J38.P$2 J166.P$1 J166.P$2 J166.P$3 J206.P$1 J206.P$2 L1.P$47
GPIO66: J154.P$1 J154.P$2 J154.P$3 J207.P$1 J207.P$2 L1.P$59
GPIO67: J17.P$1 J17.P$2 J17.P$3 L1.P$5
GPIO94: IC1.3 J167.P$1 J167.P$2 J167.P$3 L1.P$46
GPIO95: IC1.5 J176.P$1 J176.P$2 J176.P$3 L1.P$42
GPIO97: IC1.9 J168.P$1 J168.P$2 J168.P$3 L1.P$45
GPIO104: J28.P$1 J28.P$2 J28.P$3 L1.P$10
GPIO105: J21.P$1 J21.P$2 J21.P$3 L1.P$9
GPIO111: IC1.11 J18.P$1 J18.P$2 J18.P$3 L1.P$6
GPIO122: J66.P$1 J66.P$2 J99.P$1 J99.P$2 J99.P$3 L1.P$17
GPIO123: J67.P$1 J67.P$2 J100.P$1 J100.P$2 J100.P$3 L1.P$18
GPIO124: J31.P$1 J31.P$2 J31.P$3 J68.P$1 J68.P$2 L1.P$13
GPIO125: J30.P$1 J30.P$2 J30.P$3 J69.P$1 J69.P$2 L1.P$12
GPIO130: IC1.13 J156.P$1 J156.P$2 J156.P$3 L1.P$57
GPIO131: IC2.1 J155.P$1 J155.P$2 J155.P$3 L1.P$58
GPIO139: J170.P$1 J170.P$2 J170.P$3 L1.P$43 SV13.1
GPIO157: IC3.1 J141.P$1 J141.P$2 J141.P$3 L1.P$72
GPIO158: IC3.3 J142.P$1 J142.P$2 J142.P$3 L1.P$71
GPIO159: IC3.5 J114.P$1 J114.P$2 J114.P$3 L1.P$32
GPIO160: IC3.9 J113.P$1 J113.P$2 J113.P$3 L1.P$31
MENABLE: S159.P$2 U2.P$3 U4.P$3
MOTOR1+ [supply]: SV3.1 SV3.3 SV3.5 U1.15
MOTOR1- [supply]: SV3.2 SV3.4 SV3.6 U1.10
MOTOR2+ [supply]: SV1.1 SV1.3 SV1.5 U5.15
MOTOR2- [supply]: SV1.2 SV1.4 SV1.6 U5.10
MSP430_SCL: J39.P$1 J39.P$2 SV17.13 SV17.14 SV19.7
MSP430_SDA: J41.P$1 J41.P$2 SV17.11 SV17.12 SV19.6
N$1: R24.1 S1.P$3
N$2: 3V3.A R27.1
N$3: SV9.1 U6.P$7
N$4: B5.P$1 SV9.2 U6.P$6
N$5: SV9.3 U6.P$5
N$6: B4.P$1 SV10.1 U6.P$1
N$7: SV10.2 U6.P$2
N$8: SV10.3 U6.P$3
N$9 [supply]: S139.P$1 S139.P$2 S139.P$3 S139.P$4 S139.P$5
N$10 [supply]: S147.P$1 S147.P$2 S147.P$3 S147.P$4 S147.P$5
N$11 [supply]: J12.P$1 J12.P$2
N$12 [supply]: J13.P$1 J13.P$2
N$13 [supply]: J22.P$1 J22.P$2
N$14: C11.1 U8.1
N$15: C8.1 U8.11
N$16: P1.1 R38.1 U8.17
N$17: R25.1 U7.7
N$18: LED17.A R36.1
N$19: R45.2 SV16.17 SV16.18 SV18.9
N$20 [supply]: SV16.3 SV16.4 SV18.2
N$21 [supply]: SV16.5 SV16.6 SV18.3
N$22 [supply]: SV16.7 SV16.8 SV18.4
N$23 [supply]: SV16.9 SV16.10 SV18.5
N$24 [supply]: SV16.11 SV16.12 SV18.6
N$25 [supply]: SV16.13 SV16.14 SV18.7
N$26 [supply]: SV16.15 SV16.16 SV18.8
N$27: LED18.A R45.1
N$28 [supply]: SV16.19 SV16.20 SV18.10
N$30 [supply]: SV17.3 SV17.4 SV19.2
N$31: R2.2 T2.1
N$32 [supply]: SV17.5 SV17.6 SV19.3
N$33: J43.P$3 SV17.7 SV17.8 SV19.4
N$37 [supply]: SV17.15 SV17.16 SV19.8
N$38 [supply]: SV17.17 SV17.18 SV19.9
N$39 [supply]: SV17.19 SV17.20 SV19.10
N$40: J43.P$2 P2.1 R39.1 SV17.9 SV17.10 SV19.5
N$48: IC3.10 R40.1
N$49 [supply]: SV4.1 SV4.2
N$50: B1.P$1 R40.2
N$51: Q1.1 U3.2
N$54: SV5.1 SV5.2
N$58: SV5.3 SV5.4
N$61: SV5.5 SV5.6
N$70: Q1.2 U3.1
N$71 [supply]: SV4.3 SV4.4
N$72 [supply]: SV4.5 SV4.6
N$73 [supply]: SV4.7 SV4.8
N$74: ETH1.P$6 SV5.7 SV5.8
N$75 [supply]: SV4.11 SV4.12
N$76 [supply]: SV4.13 SV4.14
N$77 [supply]: SV4.15 SV4.16
N$78 [supply]: SV4.17 SV4.18
N$79 [supply]: SV4.19 SV4.20
N$80 [supply]: SV4.21 SV4.22
N$87: R1.2 T1.1
N$88 [supply]: S138.P$1 S138.P$2 S138.P$3 S138.P$4 S138.P$5
N$114: 5V.A R26.1
N$118: J1.P$1 J1.P$2 J1.P$3 U3.7
N$119: G1.+ U3.3
N$120 [supply]: SV4.23 SV4.24
N$121: ETH1.P$7 SV5.9 SV5.10
N$122 [supply]: SV4.27 SV4.28
N$123 [supply]: SV4.29 SV4.30
N$124 [supply]: SV4.31 SV4.32
N$125: R6.1 U5.1
N$126 [supply]: SV4.33 SV4.34
N$127: C2.1 R7.2 U5.3
N$128 [supply]: SV4.35 SV4.36
N$129: R8.1 U1.1
N$130: C14.1 R3.2 U1.3
N$131: JP2.1 R4.1 U1.14
N$132: R18.1 S159.P$3
N$133: JP3.1 R5.1 U5.14
N$134 [supply]: SV4.37 SV4.38
N$135: ETH1.P$5 SV5.11 SV5.12
N$136 [supply]: SV2.39 SV2.40
N$137 [supply]: SV2.37 SV2.38
N$138 [supply]: SV2.35 SV2.36
N$140 [supply]: SV2.31 SV2.32
N$142 [supply]: SV2.27 SV2.28
N$143 [supply]: SV2.25 SV2.26
N$144 [supply]: SV2.23 SV2.24
N$145 [supply]: SV2.21 SV2.22
N$146: SV6.5 SV6.6
N$147 [supply]: SV2.17 SV2.18
N$148 [supply]: SV2.15 SV2.16
N$149: ETH1.P$8 SV6.7 SV6.8
N$150 [supply]: SV2.11 SV2.12
N$151 [supply]: SV2.9 SV2.10
N$152 [supply]: SV2.7 SV2.8
N$154: ETH1.P$3 SV6.9 SV6.10
N$155: ETH1.P$4 SV6.11 SV6.12
N$157: IC2.2 LED7.C
N$158: LED7.A R17.1
N$160: IC2.4 LED8.C
N$161: LED8.A R19.1
N$164: IC2.6 LED9.C
N$175: C19.1 U2.P$14
N$176: C19.2 U2.P$13
N$177: C17.1 U2.P$12
N$178: R43.1 U4.P$6
N$179: R41.1 U2.P$6
N$186: J78.P$1 J78.P$2 R42.2 U2.P$4
N$187: TRIMPOT1.3 TRIMPOT1.4 U2.P$5
N$188: C24.1 U4.P$14
N$189: C24.2 U4.P$13
N$190: C23.1 U4.P$12
N$191: J81.P$1 J81.P$2 R44.2 U4.P$4
N$192: TRIMPOT2.3 TRIMPOT2.4 U4.P$5
N$193 [supply]: J88.P$2 J89.P$1 J89.P$2
N$194 [supply]: J88.P$5 J90.P$1 J90.P$2
N$195 [supply]: J88.P$1 J91.P$1 J91.P$2
N$196 [supply]: J88.P$3 J92.P$1 J92.P$2
N$197 [supply]: J88.P$4 J93.P$1 J93.P$2
N$268 [supply]: S167.P$1 S167.P$2 S167.P$3 S167.P$4 S167.P$5
N$269 [supply]: S168.P$1 S168.P$2 S168.P$3 S168.P$4 S168.P$5
N$270 [supply]: S169.P$1 S169.P$2 S169.P$3 S169.P$4 S169.P$5
N$271 [supply]: S170.P$1 S170.P$2 S170.P$3 S170.P$4 S170.P$5
N$272 [supply]: S171.P$1 S171.P$2 S171.P$3 S171.P$4 S171.P$5
N$273 [supply]: S172.P$1 S172.P$2 S172.P$3 S172.P$4 S172.P$5
N$274 [supply]: S173.P$1 S173.P$2 S173.P$3 S173.P$4 S173.P$5
N$275 [supply]: S174.P$1 S174.P$2 S174.P$3 S174.P$4 S174.P$5
N$276 [supply]: S175.P$1 S175.P$2 S175.P$3 S175.P$4 S175.P$5
N$277 [supply]: S176.P$1 S176.P$2 S176.P$3 S176.P$4 S176.P$5
N$278 [supply]: S177.P$1 S177.P$2 S177.P$3 S177.P$4 S177.P$5
N$279 [supply]: S178.P$1 S178.P$2 S178.P$3 S178.P$4 S178.P$5
N$280 [supply]: S179.P$1 S179.P$2 S179.P$3 S179.P$4 S179.P$5
N$281 [supply]: S180.P$1 S180.P$2 S180.P$3 S180.P$4 S180.P$5
N$282 [supply]: S181.P$1 S181.P$2 S181.P$3 S181.P$4 S181.P$5
N$283 [supply]: S182.P$1 S182.P$2 S182.P$3 S182.P$4 S182.P$5
N$284 [supply]: S183.P$1 S183.P$2 S183.P$3 S183.P$4 S183.P$5
N$285 [supply]: S184.P$1 S184.P$2 S184.P$3 S184.P$4 S184.P$5
N$286 [supply]: S185.P$1 S185.P$2 S185.P$3 S185.P$4 S185.P$5
N$287 [supply]: S186.P$1 S186.P$2 S186.P$3 S186.P$4 S186.P$5
N$288 [supply]: S187.P$1 S187.P$2 S187.P$3 S187.P$4 S187.P$5
N$289 [supply]: S188.P$1 S188.P$2 S188.P$3 S188.P$4 S188.P$5
N$290 [supply]: S189.P$1 S189.P$2 S189.P$3 S189.P$4 S189.P$5
N$311 [supply]: S210.P$1 S210.P$2 S210.P$3 S210.P$4 S210.P$5
N$312 [supply]: S211.P$1 S211.P$2 S211.P$3 S211.P$4 S211.P$5
N$313 [supply]: S212.P$1 S212.P$2 S212.P$3 S212.P$4 S212.P$5
N$314 [supply]: S213.P$1 S213.P$2 S213.P$3 S213.P$4 S213.P$5
N$315 [supply]: S214.P$1 S214.P$2 S214.P$3 S214.P$4 S214.P$5
N$316 [supply]: S215.P$1 S215.P$2 S215.P$3 S215.P$4 S215.P$5
N$317 [supply]: S216.P$1 S216.P$2 S216.P$3 S216.P$4 S216.P$5
N$318 [supply]: S217.P$1 S217.P$2 S217.P$3 S217.P$4 S217.P$5
N$319 [supply]: S218.P$1 S218.P$2 S218.P$3 S218.P$4 S218.P$5
N$320 [supply]: S219.P$1 S219.P$2 S219.P$3 S219.P$4 S219.P$5
N$321 [supply]: S220.P$1 S220.P$2 S220.P$3 S220.P$4 S220.P$5
N$322 [supply]: S221.P$1 S221.P$2 S221.P$3 S221.P$4 S221.P$5
N$323 [supply]: S222.P$1 S222.P$2 S222.P$3 S222.P$4 S222.P$5
N$324 [supply]: S223.P$1 S223.P$2 S223.P$3 S223.P$4 S223.P$5
N$325 [supply]: S224.P$1 S224.P$2 S224.P$3 S224.P$4 S224.P$5
N$326 [supply]: S225.P$1 S225.P$2 S225.P$3 S225.P$4 S225.P$5
N$327 [supply]: S226.P$1 S226.P$2 S226.P$3 S226.P$4 S226.P$5
N$335 [supply]: J125.P$1 J125.P$2 J125.P$3 U$1.3
N$336 [supply]: J126.P$1 J126.P$2 J126.P$3 U$1.4
N$337 [supply]: J127.P$1 J127.P$2 J127.P$3 U$1.5
N$338 [supply]: J128.P$1 J128.P$2 J128.P$3 U$1.6
N$339 [supply]: J129.P$1 J129.P$2 J129.P$3 U$1.7
N$340 [supply]: J130.P$1 J130.P$2 J130.P$3 U$1.8
N$341 [supply]: J131.P$1 J131.P$2 J131.P$3 U$1.9
N$342 [supply]: J132.P$1 J132.P$2 J132.P$3 U$1.10
N$344: IC1.2 LED1.C
N$345: LED1.A R11.1
N$347: IC1.4 LED2.C
N$348: LED2.A R12.1
N$350: IC1.6 LED3.C
N$351: LED3.A R13.1
N$353: IC1.8 LED4.C
N$354: LED4.A R14.1
N$356: IC1.10 LED5.C
N$357: LED5.A R15.1
N$359: IC1.12 LED6.C
N$360: LED6.A R16.1
N$361: LED9.A R20.1
N$363: IC2.8 LED10.C
N$364: LED10.A R21.1
N$366: IC2.10 LED11.C
N$367: LED11.A R22.1
N$369: IC2.12 LED12.C
N$370: LED12.A R23.1
N$372: IC3.2 LED13.C
N$373: LED13.A R28.1
N$375: IC3.4 LED14.C
N$376: LED14.A R29.1
N$378: IC3.6 LED15.C
N$379: LED15.A R30.1
N$381: IC3.8 LED16.C
N$382: LED16.A R31.1
N$404: IC3.11 J194.P$1 J194.P$2
N$407 [supply]: S130.P$1 S130.P$2 S130.P$3 S130.P$4 S130.P$5
N$414: J25.P$1 J25.P$2 J196.P$1 J196.P$2 U1.7
N$425: J34.P$1 J34.P$2 J197.P$1 J197.P$2 U5.7
POWER [supply]: B2.P$1 C1.+ C12.+ C13.+ C15.+ C16.1 C17.2 C20.+ C22.1 C23.2 C25.+ C27.+ C28.+ DCDC3.3V.1 DCDC5V.1 J5.1 POWER.2 S141.P$1 S141.P$2 S141.P$3 S141.P$4 S141.P$5 U1.9 U1.16 U2.P$11 U4.P$11 U5.9 U5.16
RESET: J98.P$1 J98.P$2 J98.P$3 L1.P$16
RESET_2: J157.P$1 J157.P$2 J157.P$3 L1.P$56
SCL: J2.P$1 J2.P$2 J2.P$3 U3.6
SDA: J3.P$1 J3.P$2 J3.P$3 U3.5
TCK: SV14.9 SV14.11 U8.31
TDI: SV14.3 U8.28
TDO: R33.2 SV14.7 U8.30
TMS: SV14.1 U8.29
TR_BASE: J6.P$1 J6.P$2 J6.P$3 R1.1
TR_BASE1: J24.P$1 J24.P$2 J24.P$3 R2.1
TR_LOAD: J4.P$1 J4.P$2 J4.P$3 T1.2
TR_LOAD1: J23.P$1 J23.P$2 J23.P$3 T2.2
TRSTN: R32.1 SV14.2 U8.16
VCC [supply]: C3.1 C4.1 C5.1 C6.1 C7.1 C9.1 C10.1 C18.1 C21.1 DCDC3.3V.3 ETH1.P$10 ETH1.P$11 IC1.14 IC2.14 IC3.14 J10.P$1 J10.P$2 J10.P$3 J123.P$1 J123.P$2 J123.P$3 J177.P$1 J177.P$2 J177.P$3 L1.P$1 L1.P$41 R4.2 R5.2 R6.2 R8.2 R9.1 R10.1 R11.2 R12.2 R13.2 R14.2 R15.2 R16.2 R17.2 R18.2 R19.2 R20.2 R21.2 R22.2 R23.2 R24.2 R25.2 R27.2 R28.2 R29.2 R30.2 R31.2 R33.1 R34.1 R35.1 R36.2 R37.2 R38.2 R39.2 R42.1 R44.1 S53.P$1 S53.P$2 S53.P$3 S53.P$4 S53.P$5 S53.P$6 S53.P$7 S53.P$8 S53.P$9 S53.P$10 S58.P$1 S58.P$2 S58.P$3 S58.P$4 S58.P$5 S58.P$6 S58.P$7 S58.P$8 S58.P$9 S58.P$10 SV6.1 SV6.2 SV11.2 SV12.2 SV13.3 SV13.7 SV14.5 SV16.1 SV16.2 SV18.1 TRIMPOT1.1 TRIMPOT1.2 TRIMPOT2.1 TRIMPOT2.2 U1.2 U1.6 U3.8 U5.2 U5.6 U6.P$8 U7.8 U8.4 U8.22 U$1.1

## Tracks (layer width: path | path; a pad name or v marks a point on that pad's centre or on a via)
28027_GPIO0  (via drill 0.51)
  Top 0.203: v128.02,101.8 128.02,103.73 126.9,104.85 126.09,104.85 U8.37 | 9.14,39.22 J26.P$1 | J26.P$2
  Top 0.61: J26.P$2 9.14,39.22
  Bottom 0.203: v128.02,101.8 127.51,101.8 123.55,97.84 121.92,97.84 117.04,92.96 117.04,92.05 104.85,79.86 102.41,79.86 88.59,66.04 88.49,66.04 87.48,65.02 87.48,37.9 82.91,33.33 82.91,29.57 67.16,13.82 67.16,10.36 66.65,9.86 55.88,9.86 29.26,36.47 14.33,36.47
  Bottom 0.61: J26.P$2 14.33,36.47
28027_GPIO1  (via drill 0.51)
  Top 0.203: v128.83,102.62 128.52,102.92 128.52,104.55 127,106.07 125.07,106.07 124.87,105.87 124.87,104.55 125.07,104.34 125.98,104.34 U8.36 | v101.09,75.39 101.09,48.97 85.45,33.33 85.45,30.28 84.73,29.57 v55.17,29.57 | 9.14,46.84 J27.P$1 | J27.P$2
  Top 0.61: J27.P$2 9.14,46.84
  Bottom 0.203: v128.83,102.62 128.83,101.5 124.77,97.43 122.12,97.43 117.45,92.76 117.45,91.14 103.63,77.32 103.02,77.32 v101.09,75.39 | v55.17,29.57 49.78,29.57 42.88,36.47 29.87,36.47 29.46,36.88 23.06,36.88 16.76,43.18 16.26,43.18 15.24,44.2 15.24,44.7 14.22,45.72 12.7,45.72
  Bottom 0.61: J27.P$2 12.7,45.72
28027_GPIO2
  Top 0.203: U8.5 117.75,103.02 111.05,103.02 110.24,102.21 108.2,102.21 105.46,104.95 105.46,113.59 SV15.16
28027_GPIO3  (via drill 0.51)
  Top 0.203: v116.23,102.21 117.75,102.21 U8.6
  Bottom 0.203: v116.23,102.21 116.23,105.36 108,113.59 SV15.14
28027_GPIO4
  Top 0.203: U8.7 117.75,101.6 116.74,101.6 116.53,101.4 115.93,101.4 115.52,101.8 108,101.8 104.34,105.46 104.34,114.2 104.95,114.81 109.32,114.81 110.44,113.69 SV15.12
28027_GPIO5  (via drill 0.51)
  Top 0.203: v115.21,100.99 117.75,100.99 U8.8 | v113.08,107.39 113.08,113.59 SV15.10
  Bottom 0.203: v115.21,100.99 115.21,105.26 v113.08,107.39
28027_GPIO6
  Top 0.203: U8.9 117.75,100.28 115.62,100.28 115.52,100.18 111.05,100.18 109.83,101.4 107.8,101.4 103.94,105.26 103.94,116.33 104.95,117.35 110.95,117.35 111.96,116.33 111.96,115.72 112.88,114.81 114.4,114.81 115.52,113.69 SV15.8
28027_GPIO7  (via drill 0.51)
  Top 0.203: v119.38,100.38 118.77,99.77 117.86,99.77 U8.10 | v119.38,105.77 119.38,106.17 119.48,106.27 119.48,112.27 118.16,113.59 SV15.6
  Bottom 0.203: v119.38,105.77 v119.38,100.38
28027_GPIO12  (via drill 0.51)
  Top 0.203: v120.19,97.54 119.99,97.74 117.86,97.74 U8.13
  Bottom 0.203: v120.19,97.54 121.01,97.54 121.72,98.25 123.34,98.25 129.24,104.14 130.45,104.14 130.96,104.65 130.96,106.38 124.77,112.57 121.72,112.57 120.7,113.59 SV15.4
28027_GPIO34
  Top 0.203: LED17.C 142.24,88.8 142.34,88.9 R37.1 142.24,88.9 142.24,90.12 134.01,98.35 126.09,98.35 U8.27
28027_SCL  (via drill 0.51)
  Top 0.203: R34.2 132.49,83.41 131.27,82.19 126.39,82.19 123.65,84.94 123.65,91.85 119.08,96.42 117.86,96.42 U8.15 117.75,96.52 116.84,96.52 v116.03,97.33 | v103.43,116.94 104.24,117.75 118.16,117.75 119.69,116.23 120.6,116.23 SV15.3
  Bottom 0.203: v103.43,116.94 103.43,110.44 110.95,102.92 110.95,97.94 111.56,97.33 v116.03,97.33
28027_SDA  (via drill 0.51)
  Top 0.203: v123.65,94.89 121.31,94.89 119.18,97.03 117.86,97.03 U8.14 | v128.42,90.12 130.96,90.12 132.49,88.59 R35.2 | v127,107.29 129.34,104.95 129.34,104.65 v132.18,101.8
  Bottom 0.203: v128.42,90.12 124.46,94.08 | 124.46,94.08 v123.65,94.89 | v127,107.29 121.82,107.29 117.04,112.06 117.04,113.79 116.03,114.81 115.42,114.81 114.5,115.72 114.5,116.74 115.11,117.35 116.03,117.35 117.14,116.23 118.06,116.23 SV15.5 | 124.46,94.08 v132.18,101.8
28027_SPICLKA  (via drill 0.51)
  Top 0.203: v124.36,101.4 124.56,101.6 125.98,101.6 U8.32
  Bottom 0.203: v124.36,101.4 122.12,101.4 116.84,96.11 115.72,96.11 108.41,88.8 108.41,85.55 J38.P$1
28027_SPISIMOA  (via drill 0.51)
  Top 0.203: v129.64,101.8 129.64,102.92 128.93,103.63 128.93,104.75 127.2,106.48 124.87,106.48 124.46,106.07 124.46,104.34 125.17,103.63 125.98,103.63 U8.35 | v118.97,93.07 116.64,93.07 116.53,93.17 110.95,93.17 J36.P$1
  Bottom 0.203: v129.64,101.8 129.24,101.4 129.24,101.3 124.97,97.03 122.33,97.03 118.97,93.67 v118.97,93.07
28027_SPISOMIA  (via drill 0.51)
  Top 0.203: v124.46,103.12 124.56,103.02 125.98,103.02 U8.34
  Bottom 0.203: v124.46,103.12 124.46,102.41 125.17,101.7 125.17,101.09 122.73,98.65 119.99,98.65 117.04,95.71 115.93,95.71 108.81,88.59 108.81,84.43 107.7,83.31 106.88,83.31 106.17,84.02 106.17,85.85 J35.P$1
28027_SPISTEA  (via drill 0.51)
  Top 0.203: v123.65,102.31 125.98,102.31 U8.33
  Bottom 0.203: v123.65,102.31 122.43,102.31 116.64,96.52 111.76,96.52 J37.P$1
+5V  (via drill 0.51)
  Top 0.61: L1.P$61 49.58,102.31 52.02,102.31 J152.P$1 52.32,102.31 54.56,102.31 J152.P$2 54.86,102.31 57.1,102.31 J152.P$3 | L1.P$21 49.58,165.81 52.02,165.81 J103.P$1 52.32,165.81 54.56,165.81 J103.P$2 54.86,165.81 57.1,165.81 J103.P$3 | J200.P$1 J200.P$2 17.27,159.82 18.49,158.6 18.49,151.89 | 18.49,151.89 17.27,150.67 17.27,150.06 J203.P$2 J203.P$1 14.43,149.66 14.43,142.04 9.86,137.47 DCDC5V.3 | SV2.4 3.15,53.95 3.15,51.51 SV2.2 3.45,51.51 5.69,51.51 SV2.1 5.69,51.82 5.69,53.95 SV2.3 | R26.2 2.23,120.7 2.23,123.65 2.03,123.85 S17.P$5 | S17.P$5 1.93,124.16 1.93,126.39 S18.P$5 2.23,126.49 4.47,126.49 S18.P$4 | S17.P$5 2.44,123.85 4.47,123.85 S17.P$4 4.78,123.95 7.01,123.95 S17.P$3 | S18.P$3 7.01,126.39 7.01,124.26 S17.P$3 | S17.P$2 9.55,123.95 7.32,123.95 S17.P$3 | S18.P$2 9.55,126.39 9.55,124.26 S17.P$2 | S17.P$1 12.09,123.95 9.86,123.95 S17.P$2 | v44.2,133.81 37.69,133.81 19.81,151.69 18.69,151.69 18.49,151.89
  Bottom 0.61: 48.26,133.81 48.26,164.49 49.48,165.71 L1.P$21 | 48.26,133.81 48.26,121.92 49.48,120.7 49.48,102.31 L1.P$61 | DCDC5V.3 9.75,137.36 9.75,126.59 9.65,126.49 S18.P$2 9.96,126.49 12.09,126.49 S18.P$1 | SV2.4 3.15,54.05 3.15,54.66 1.83,55.98 1.83,100.18 4.98,103.33 15.85,103.33 17.78,105.26 17.78,122.33 16.26,123.85 12.19,123.85 S17.P$1 | v44.2,133.81 48.26,133.81
A4973EN
  Top 0.203: 49.28,19.3 36.88,31.7 36.88,55.47 38.56,57.15 | 38.56,57.15 38.61,57.2 39.83,57.2 U5.8 | U1.8 23.37,57.3 23.37,62.69 26.42,65.73 32.31,65.73 38.51,59.54 38.51,57.2 38.56,57.15
  Top 0.61: 49.28,19.3 S1.P$2
ADCA0  (via drill 0.51)
  Top 0.203: v133.1,94.28 132.89,94.49 126.09,94.49 U8.21
  Bottom 0.203: v133.1,94.28 135.84,94.28 135.94,94.18 139.6,94.18 143.87,98.45 143.87,106.88 142.04,108.71 141.53,108.71 140.51,109.73 140.51,110.24 139.5,111.25 138.99,111.25 138.18,112.06 138.18,113.59 136.65,115.11 116.64,115.11 115.62,116.13 SV15.7
ADCA2  (via drill 0.51)
  Top 0.203: v127.61,93.67 127.51,93.78 126.09,93.78 U8.20 | v127.71,108.51 v133.3,102.92 | v118.06,112.17 116.64,113.59 116.64,114.2 115.72,115.11 114.71,115.11 113.69,116.13 113.08,116.13 SV15.9
  Bottom 0.203: v127.61,93.67 127.61,95 134.11,101.5 134.11,102.11 v133.3,102.92 | v127.71,108.51 121.72,108.51 v118.06,112.17
ADCA4  (via drill 0.51)
  Top 0.203: v111.76,98.25 116.13,93.88 117.75,93.88 U8.19
  Bottom 0.203: v111.76,98.25 111.76,108.31 106.88,113.18 106.88,115.11 107.9,116.13 SV15.13
ADCA6
  Top 0.203: U8.18 117.86,94.49 118.67,94.49 123.24,89.92 123.24,84.73 126.19,81.79 135.53,81.79 138.48,84.73 142.75,84.73 144.27,86.26 144.27,114.3 141.22,117.35 122.33,117.35 122.12,117.14 122.12,114.71 123.14,113.69 SV15.2
ADCB2  (via drill 0.51)
  Top 0.203: v122.02,104.24 122.02,99.57 125.07,96.52 125.98,96.52 U8.24
  Bottom 0.203: v122.02,104.24 113.69,112.57 112.57,112.57 111.56,113.59 111.56,115.11 110.54,116.13 SV15.11
ADCB4  (via drill 0.51)
  Top 0.203: v128.63,97.13 126.09,97.13 U8.25 | v130.15,104.95 v133.3,101.8
  Bottom 0.203: v133.3,101.8 v128.63,97.13 | v130.15,104.95 122.73,104.95 114.1,113.59 114.1,114.2 113.18,115.11 112.57,115.11 111.56,116.13 111.56,116.74 110.95,117.35 106.58,117.35 105.46,116.23 SV15.15
ADCIN14
  Top 0.203: 49.58,160.73 L1.P$23 | 52.02,160.73 J105.P$1 52.12,160.73 | 54.66,160.73 J105.P$2 54.56,160.73 | 57.1,160.73 J105.P$3
  Top 0.61: 52.02,160.73 49.58,160.73 | 57.1,160.73 54.66,160.73 | 54.56,160.73 52.12,160.73
ADCIN15
  Top 0.203: 49.58,97.23 L1.P$63 | 52.02,97.23 J150.P$1 52.12,97.23 | 54.66,97.23 J150.P$2 54.56,97.23 | 57.1,97.23 J150.P$3
  Top 0.61: 52.02,97.23 49.58,97.23 | 57.1,97.23 54.66,97.23 | 54.56,97.23 52.12,97.23
ADCINA2  (via drill 0.51)
  Top 0.203: 49.58,145.49 L1.P$29 | 52.02,145.49 J111.P$1 52.12,145.49 | 54.66,145.49 J111.P$2 54.56,145.49 | 57.1,145.49 J111.P$3 | v141.83,147.42 141.43,147.42 140,146 139.5,146 138.18,144.68 138.18,144.27 132.59,138.68 132.59,135.94 131.98,135.33 119.28,135.33 v115.52,131.57
  Top 0.61: 52.02,145.49 49.58,145.49 | 57.1,145.49 54.66,145.49 | 54.56,145.49 52.12,145.49
  Bottom 0.203: v141.83,147.42 141.83,150.67 151.18,160.02 152.2,160.02 153.11,160.93 153.11,161.85 152.09,162.87 152.09,163.88 SV11.3 | v115.52,131.57 98.86,131.57 96.72,129.44 84.84,129.44 79.96,134.31 74.57,134.31 63.5,145.39 57.2,145.39 J111.P$3
ADCINA3
  Top 0.203: 49.58,153.11 L1.P$26 | 52.02,153.11 J108.P$1 52.12,153.11 | 54.66,153.11 J108.P$2 54.56,153.11 | 57.1,153.11 J108.P$3
  Top 0.61: 52.02,153.11 49.58,153.11 | 57.1,153.11 54.66,153.11 | 54.56,153.11 52.12,153.11
  Bottom 0.203: SV11.4 152.09,166.42 152.09,165.41 153.52,163.98 153.52,139.09 136.14,121.72 101.4,121.72 94.08,129.03 84.63,129.03 79.76,133.91 74.37,133.91 64.01,144.27 56.69,144.27 56.08,144.88 56.08,151.99 57.1,153.01 J108.P$3
ADCINA4
  Top 0.203: 49.58,81.99 L1.P$69 | 52.02,81.99 J144.P$1 52.12,81.99 | 54.66,81.99 J144.P$2 54.56,81.99 | 57.1,81.99 J144.P$3
  Top 0.61: 52.02,81.99 49.58,81.99 | 57.1,81.99 54.66,81.99 | 54.56,81.99 52.12,81.99
ADCINA5
  Top 0.203: 49.58,89.61 L1.P$66 | 52.02,89.61 J147.P$1 52.12,89.61 | 54.66,89.61 J147.P$2 54.56,89.61 | 57.1,89.61 J147.P$3
  Top 0.61: 52.02,89.61 49.58,89.61 | 57.1,89.61 54.66,89.61 | 54.56,89.61 52.12,89.61
ADCINB2
  Top 0.203: 49.58,148.03 L1.P$28 | 52.02,148.03 J110.P$1 52.12,148.03 | 54.66,148.03 J110.P$2 54.56,148.03 | 57.1,148.03 J110.P$3
  Top 0.61: 52.02,148.03 49.58,148.03 | 57.1,148.03 54.66,148.03 | 54.56,148.03 52.12,148.03
ADCINB3
  Top 0.203: 49.58,155.65 L1.P$25 | 52.02,155.65 J107.P$1 52.12,155.65 | 54.66,155.65 J107.P$2 54.56,155.65 | 57.1,155.65 J107.P$3
  Top 0.61: 52.02,155.65 49.58,155.65 | 57.1,155.65 54.66,155.65 | 54.56,155.65 52.12,155.65
ADCINB4  (via drill 0.51)
  Top 0.203: 49.58,84.53 L1.P$68 | 52.02,84.53 J145.P$1 52.12,84.53 | 54.66,84.53 J145.P$2 54.56,84.53 | 57.1,84.53 J145.P$3 | v95.5,112.37 101.7,112.37 SV12.4
  Top 0.61: 52.02,84.53 49.58,84.53 | 57.1,84.53 54.66,84.53 | 54.56,84.53 52.12,84.53
  Bottom 0.203: v95.5,112.37 86.46,103.33 76,103.33 57.2,84.53 J145.P$3
ADCINB5